# Altium PCB Shablon.PcbDoc
Units mm, origin at the board's own origin, x right, y up, seen from the top; angles counter-clockwise.
Board outline 152.4 x 101.6 mm, 12 copper layers (TopLayer, Internal Plane 1, Internal Plane 2, MidLayer1, MidLayer2, MidLayer3, MidLayer4, MidLayer5, MidLayer6, MidLayer7, MidLayer8, BottomLayer), stack 3.307 mm thick; 1 components, 0 nets, 99 pads, 0 vias.
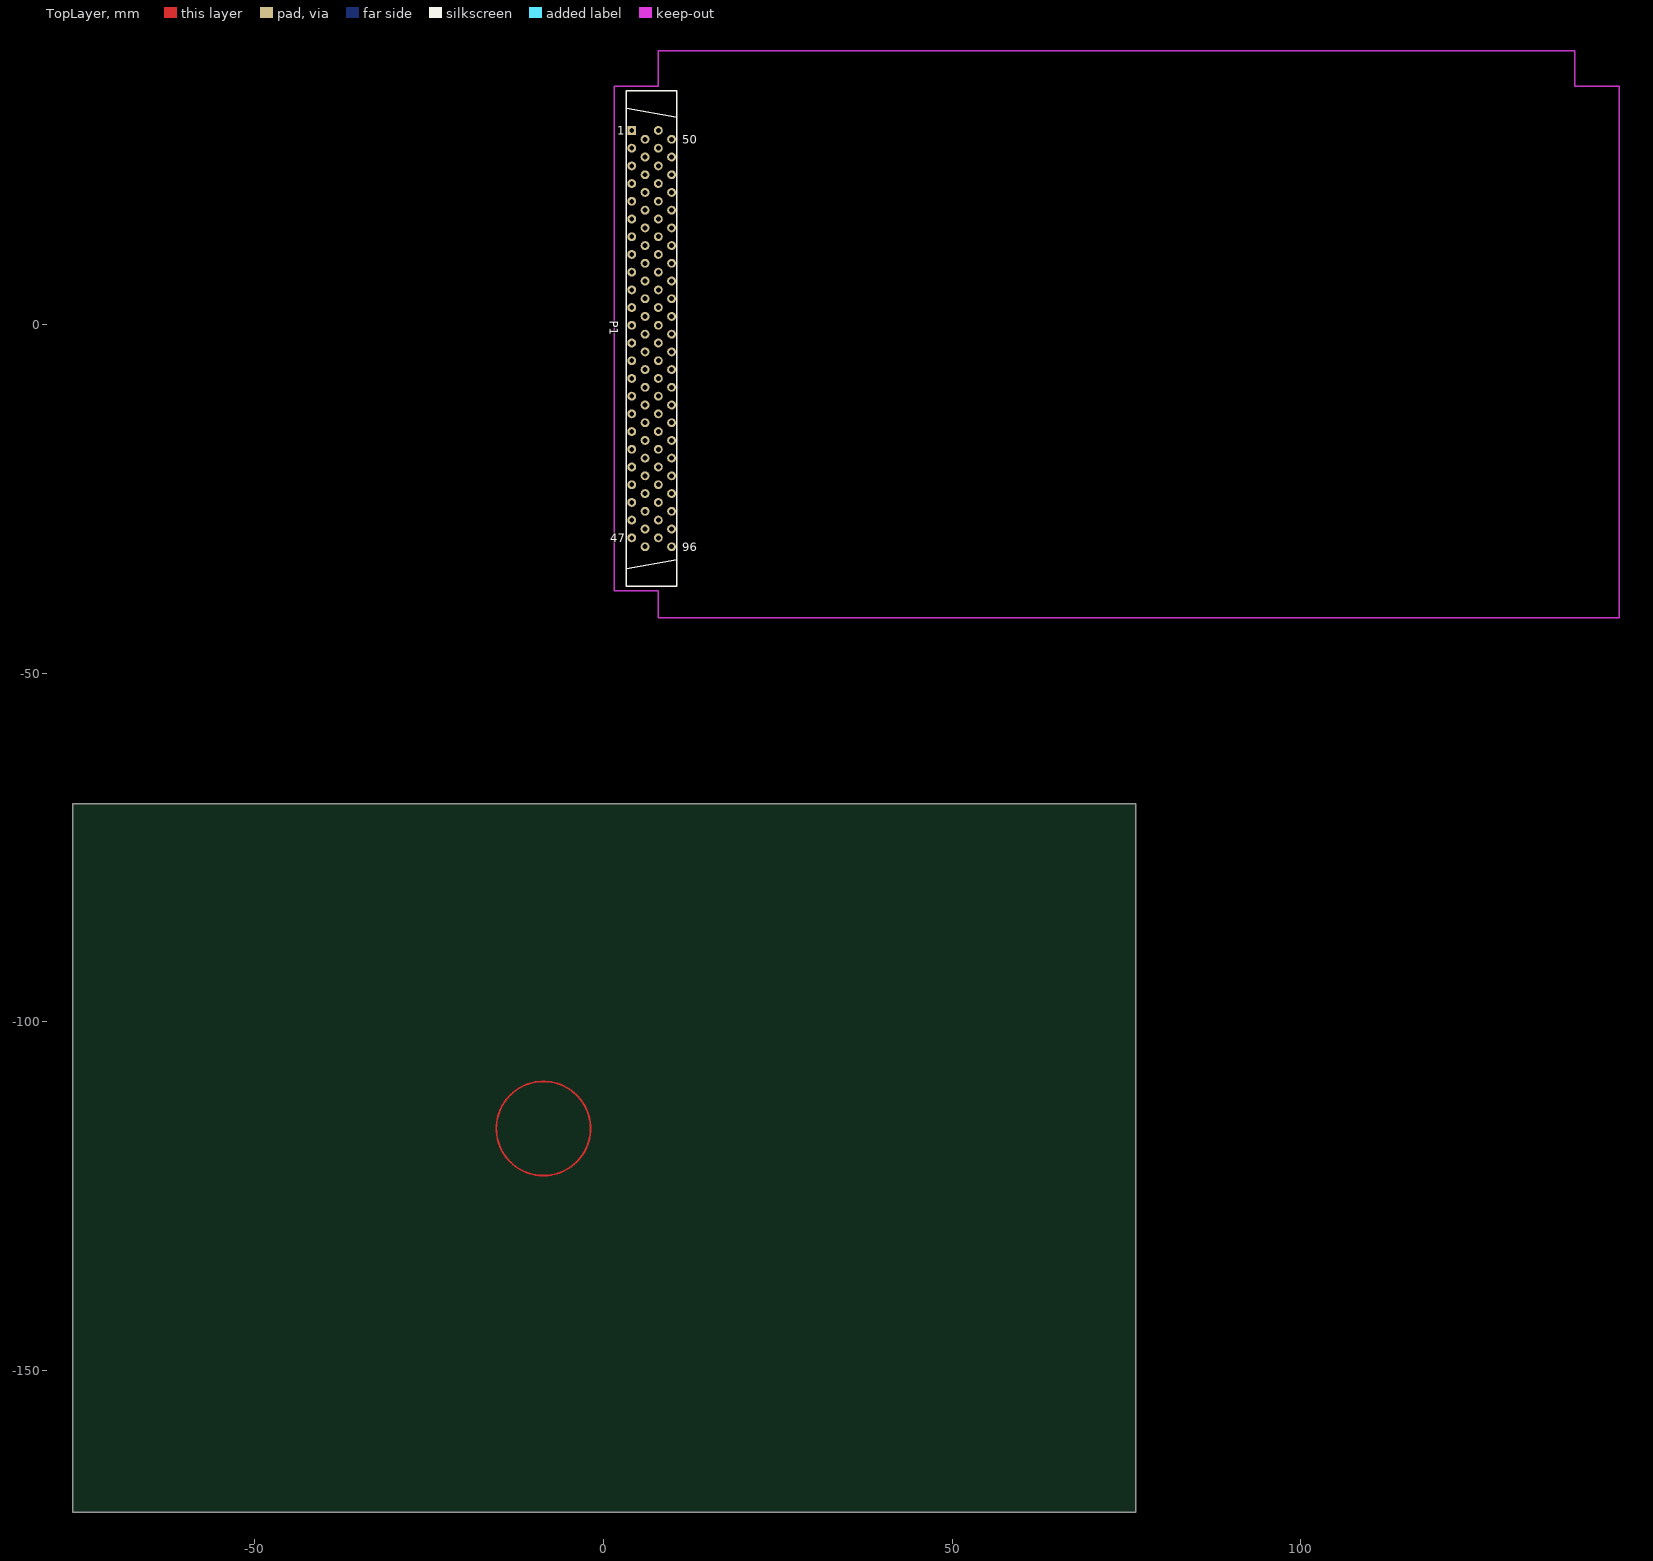
[diagram p0: TopLayer view]
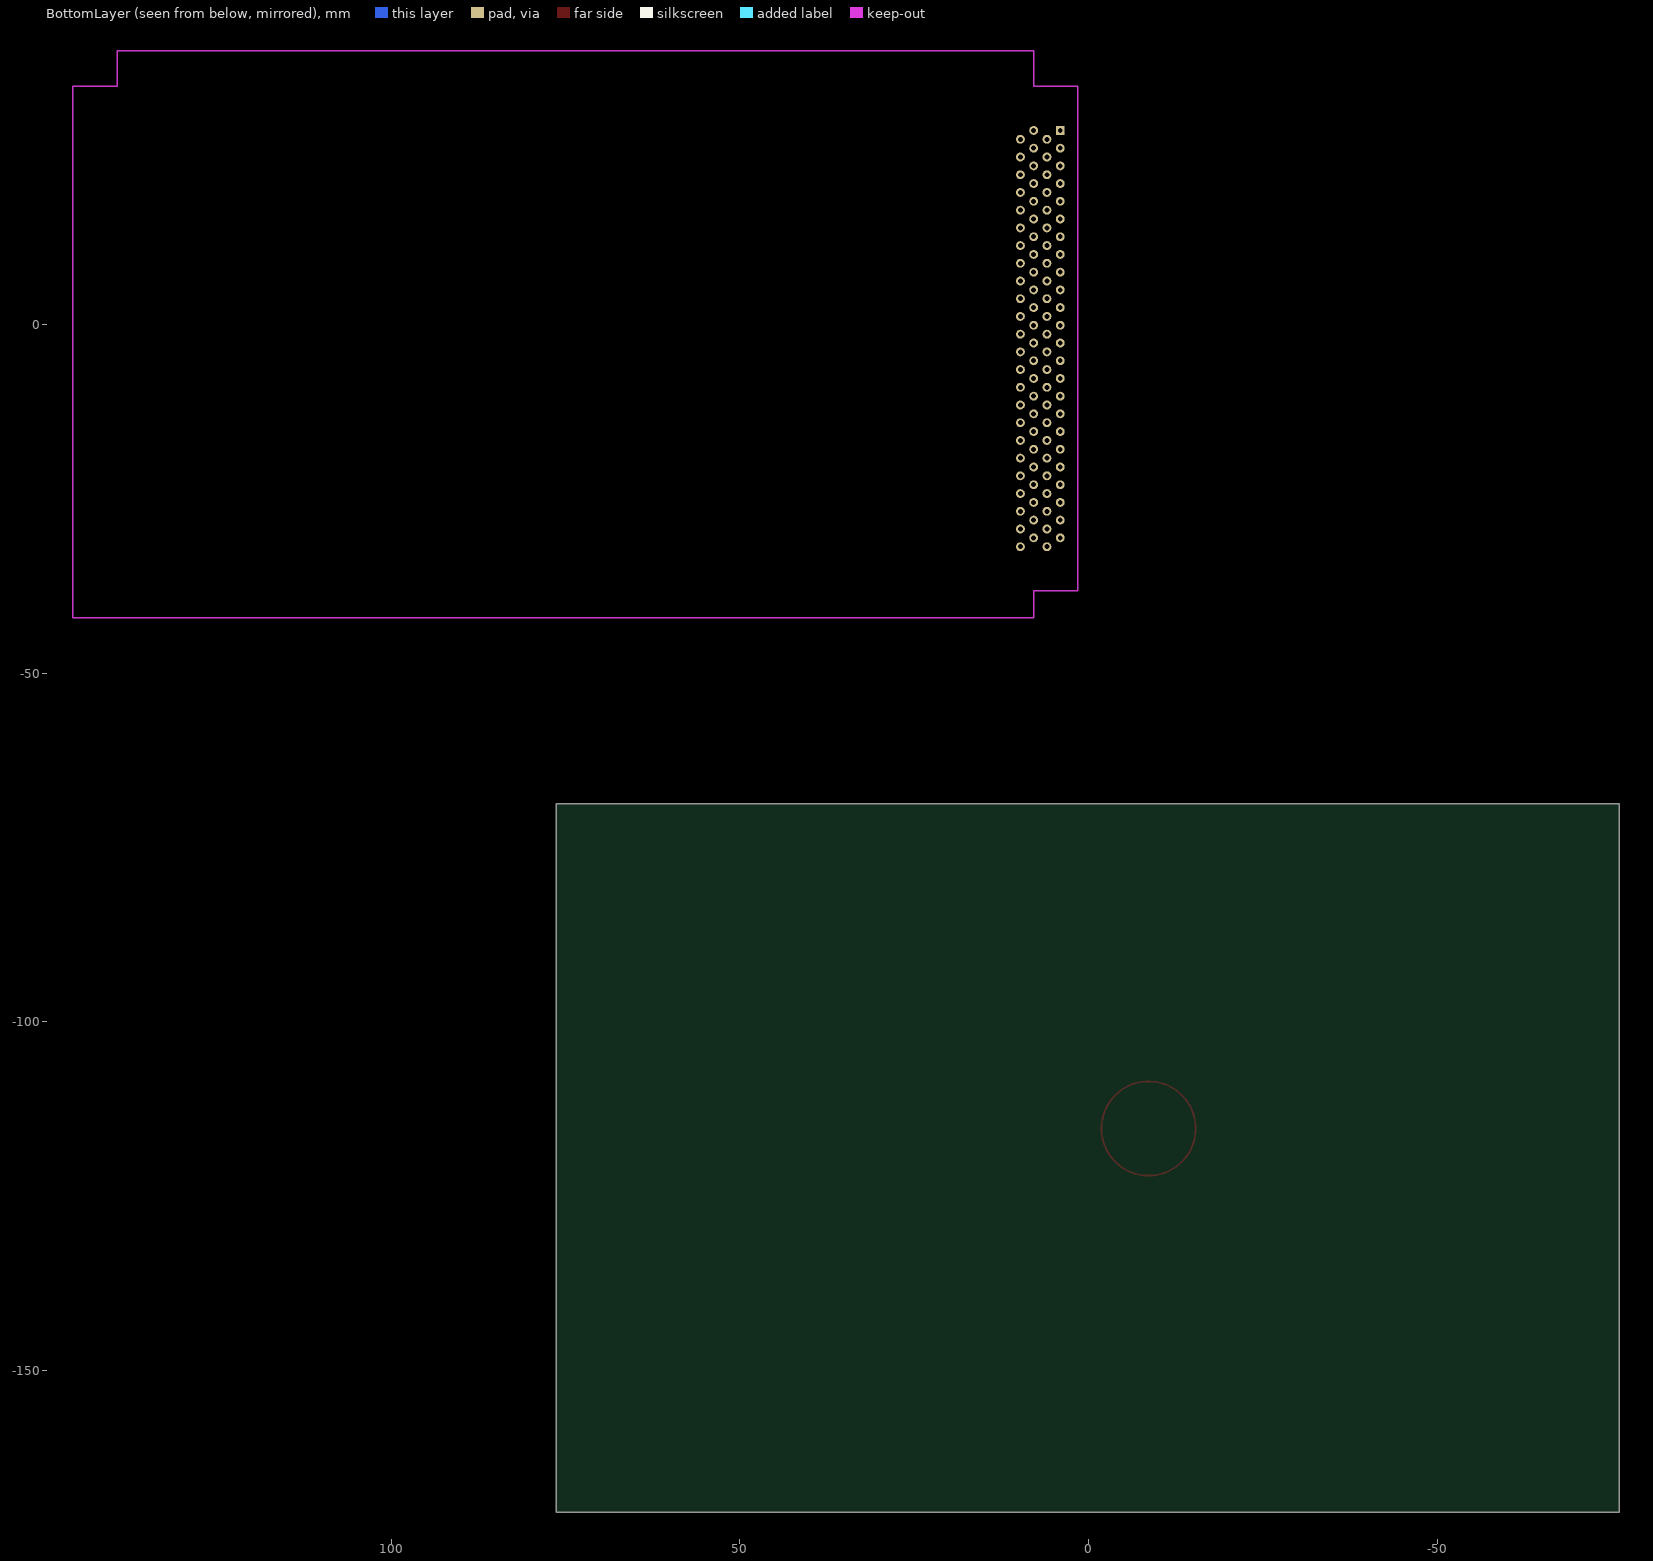
[diagram p1: BottomLayer view, seen from below]
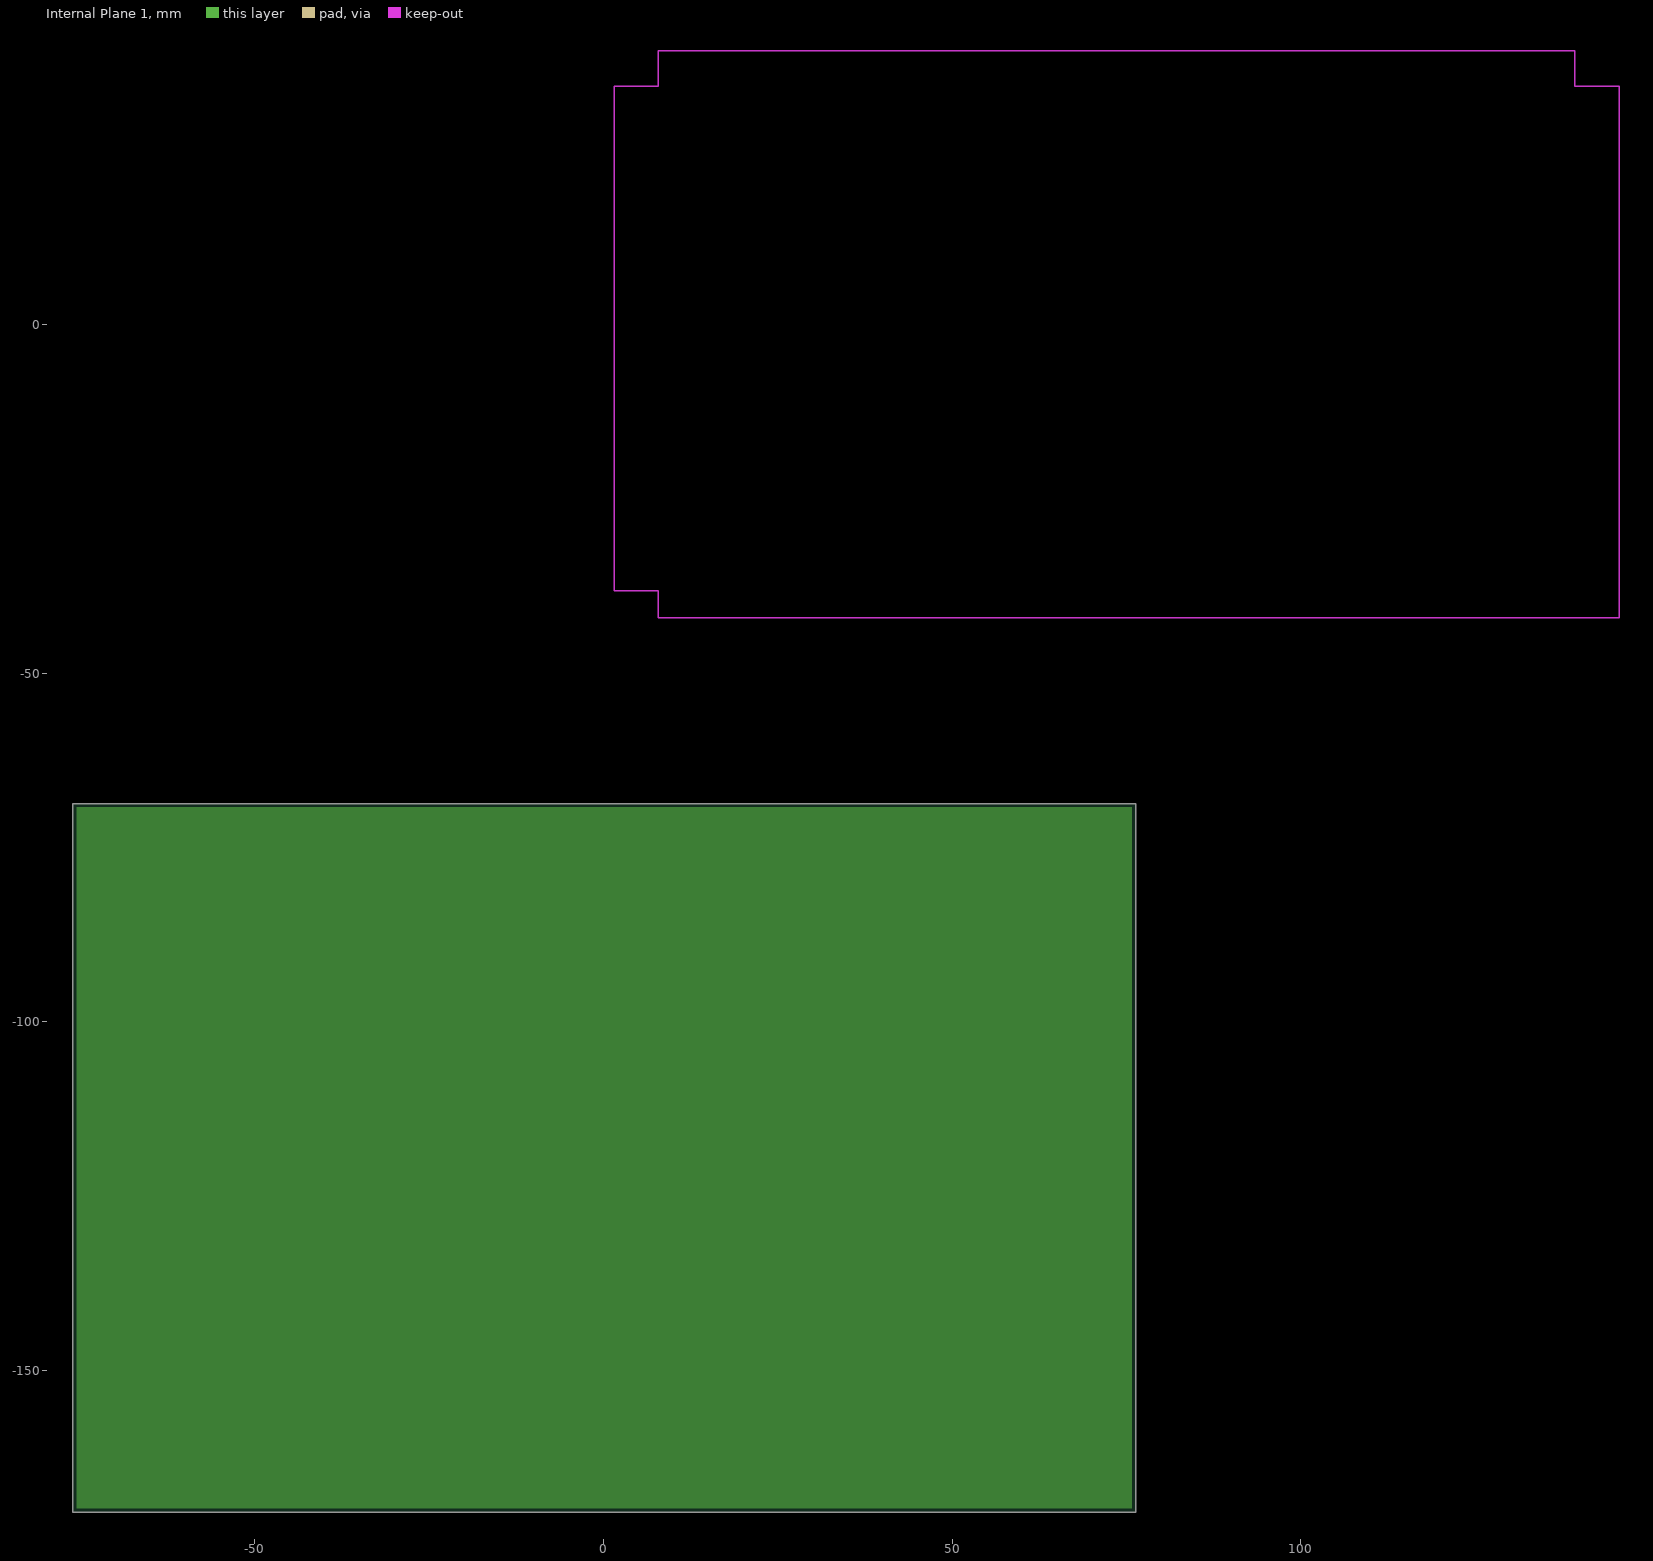
[diagram p2: Internal Plane 1, clearances drawn from the general rule]
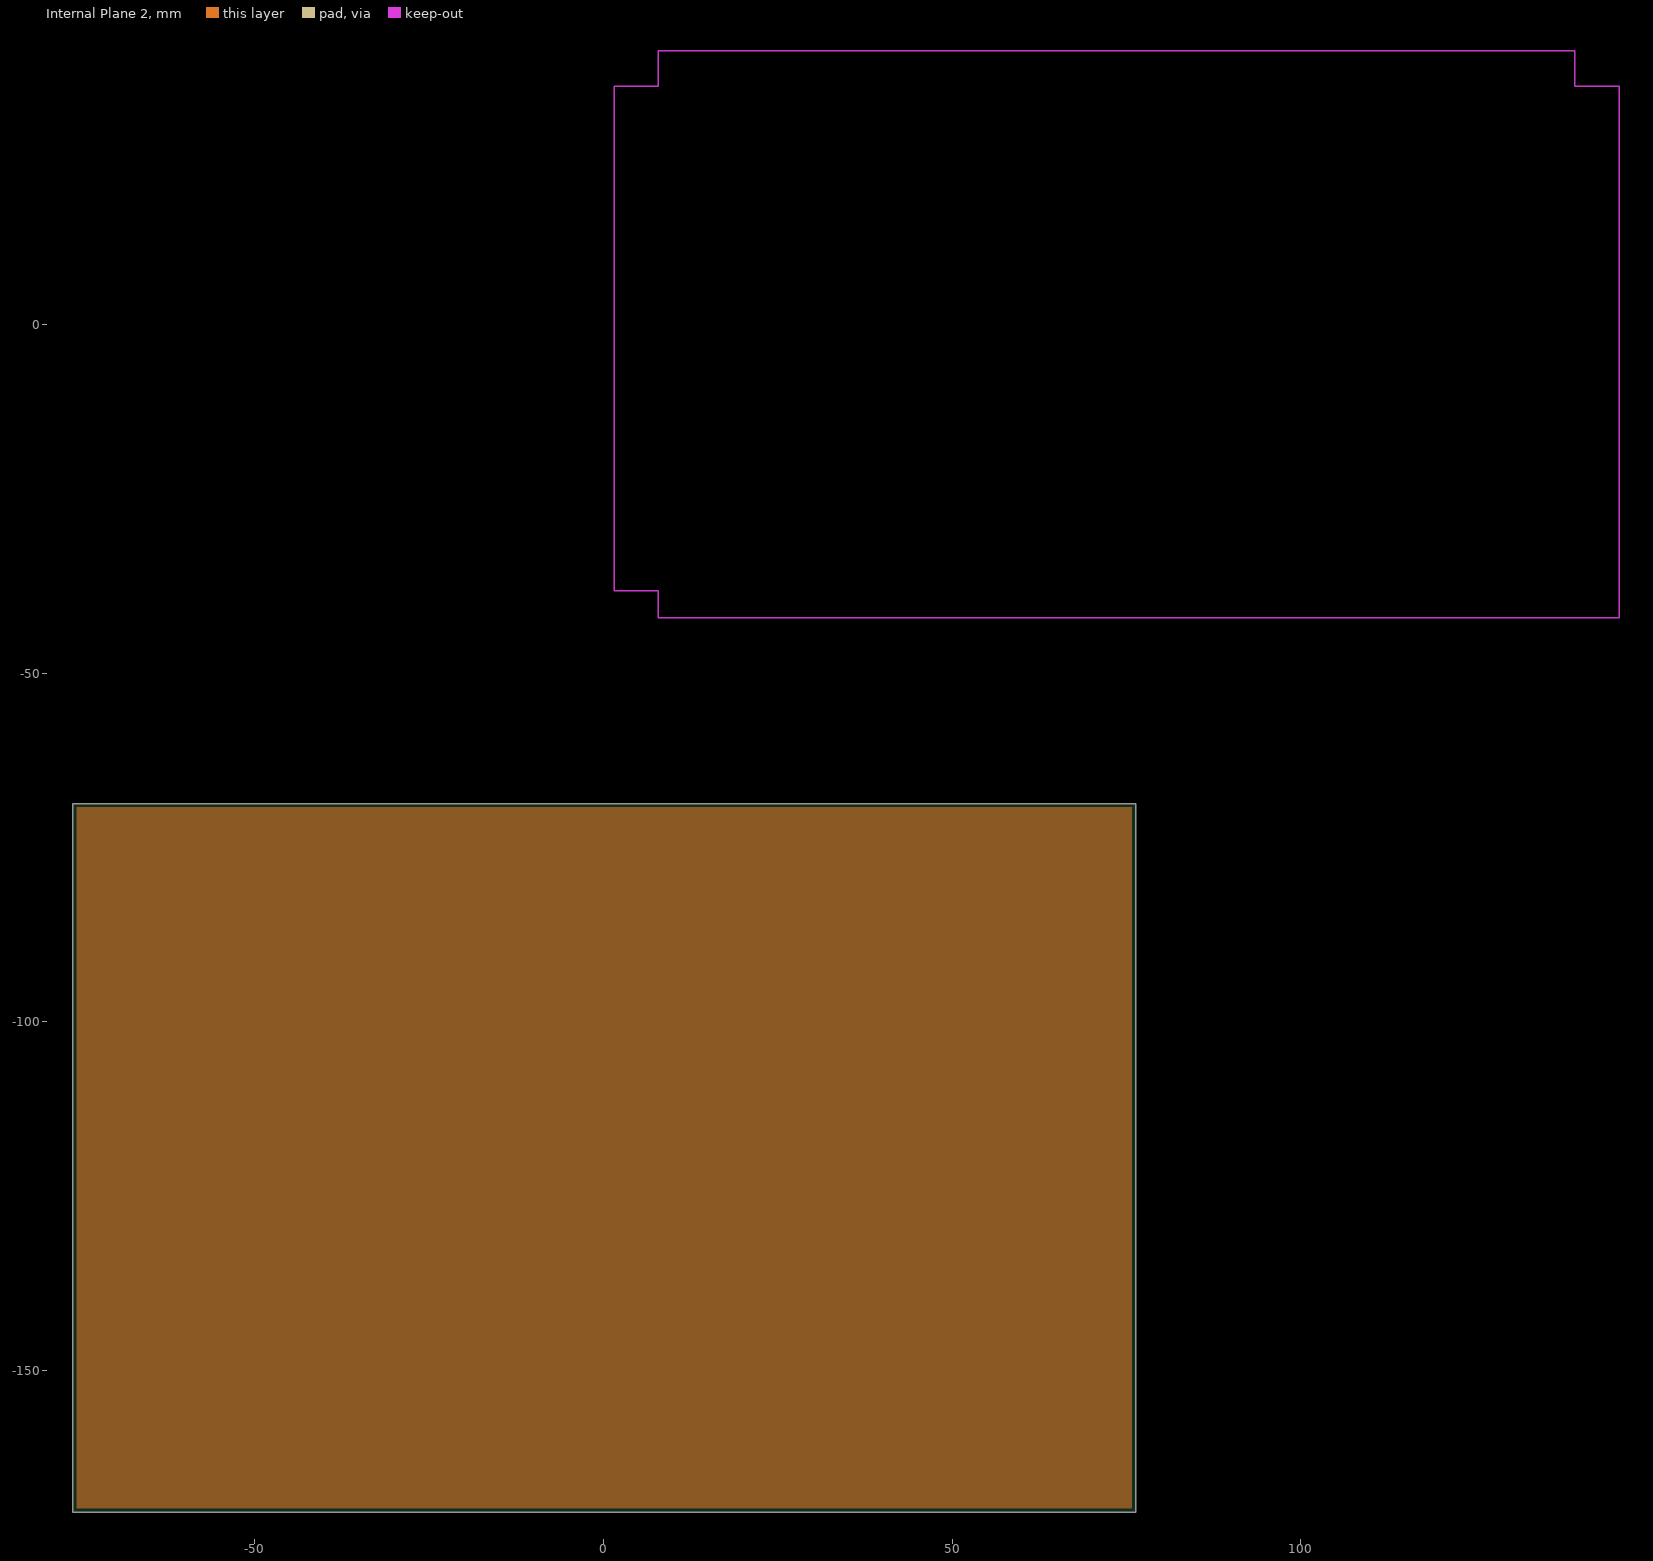
[diagram p3: Internal Plane 2, clearances drawn from the general rule]
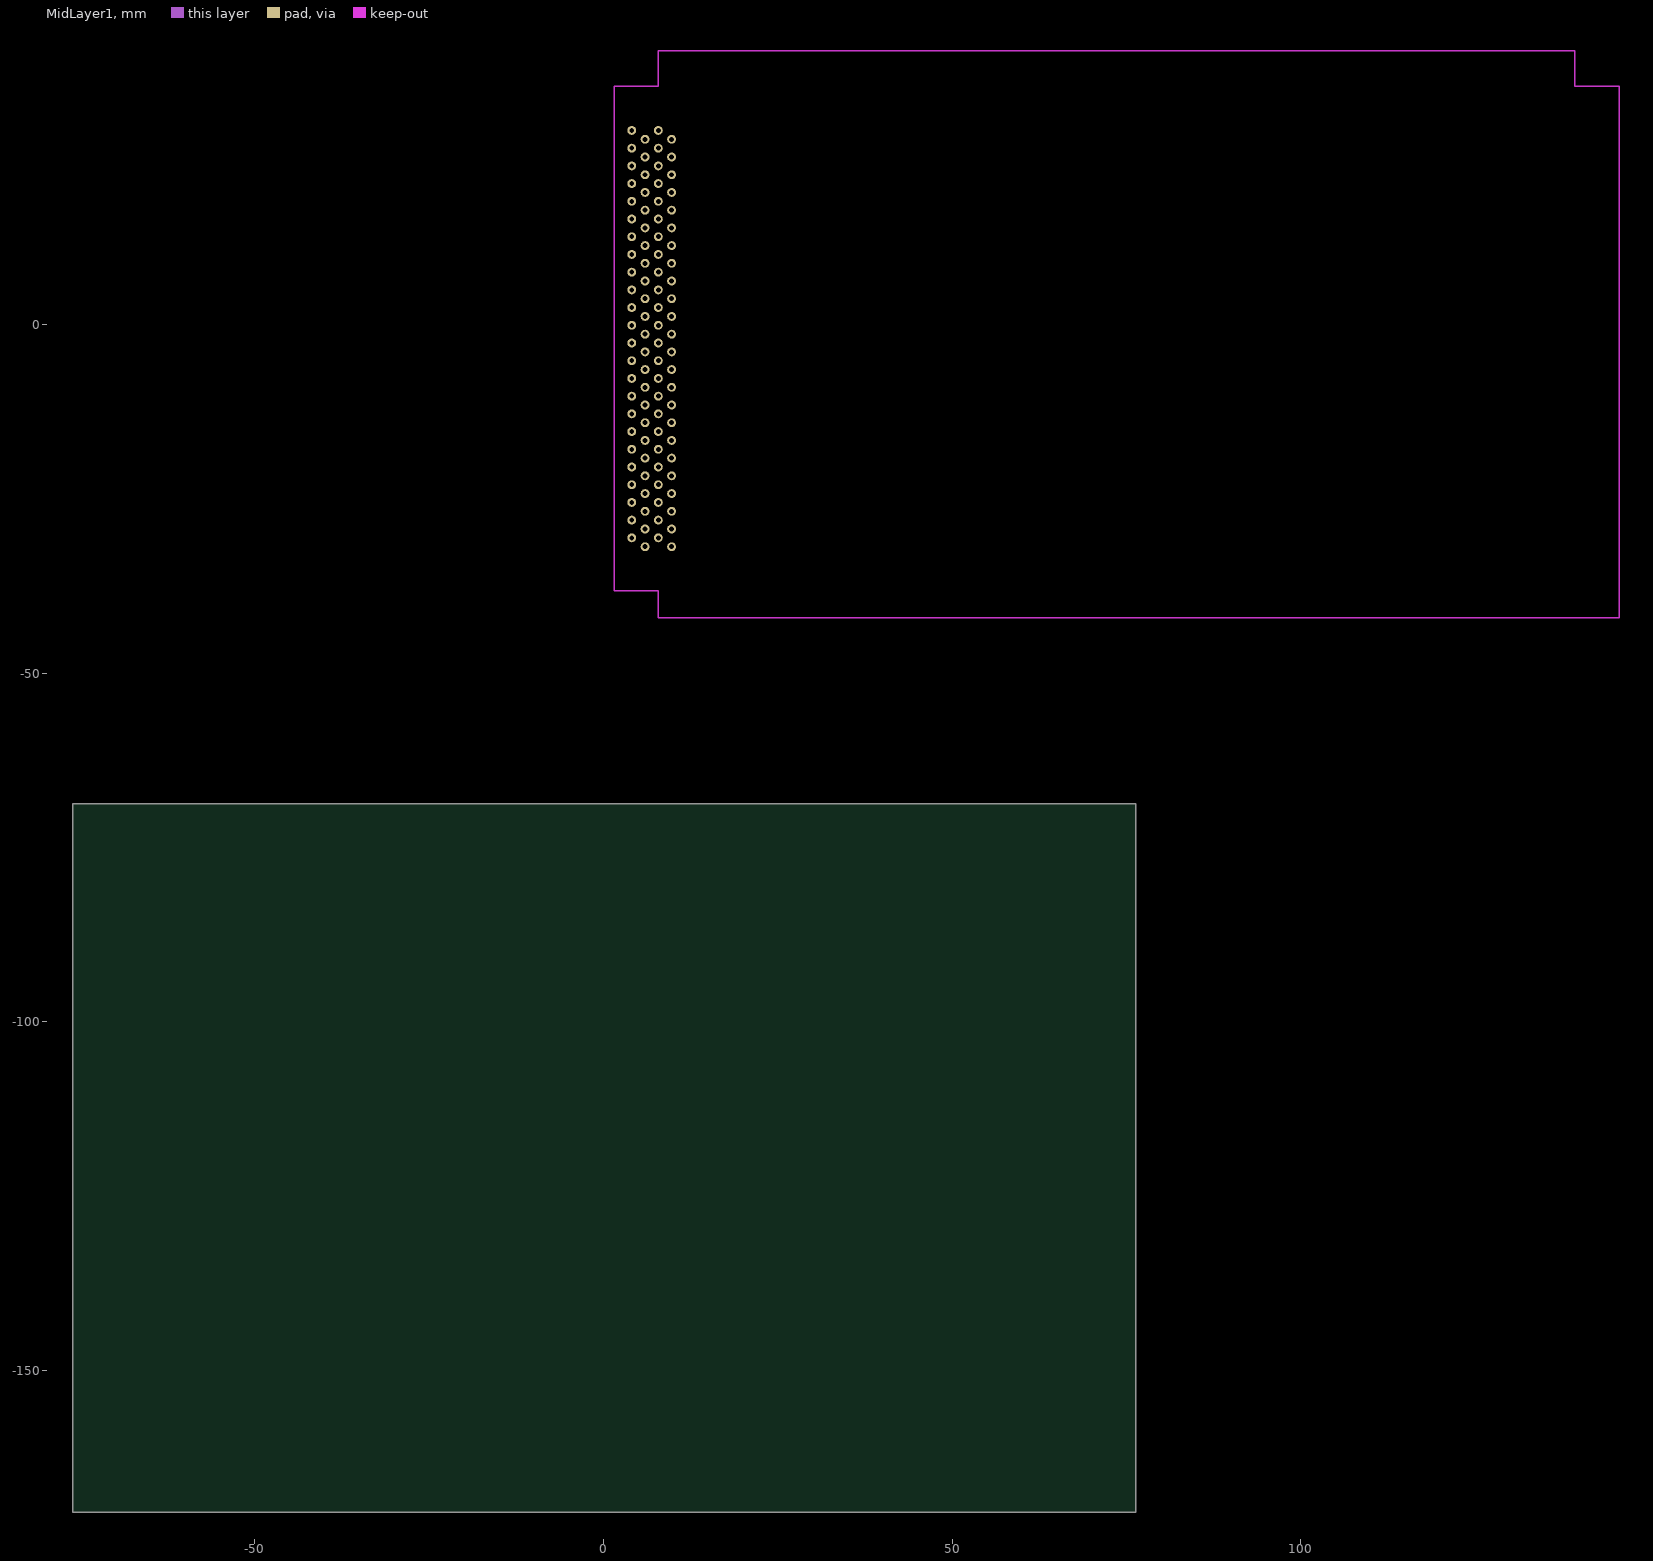
[diagram p4: MidLayer1]
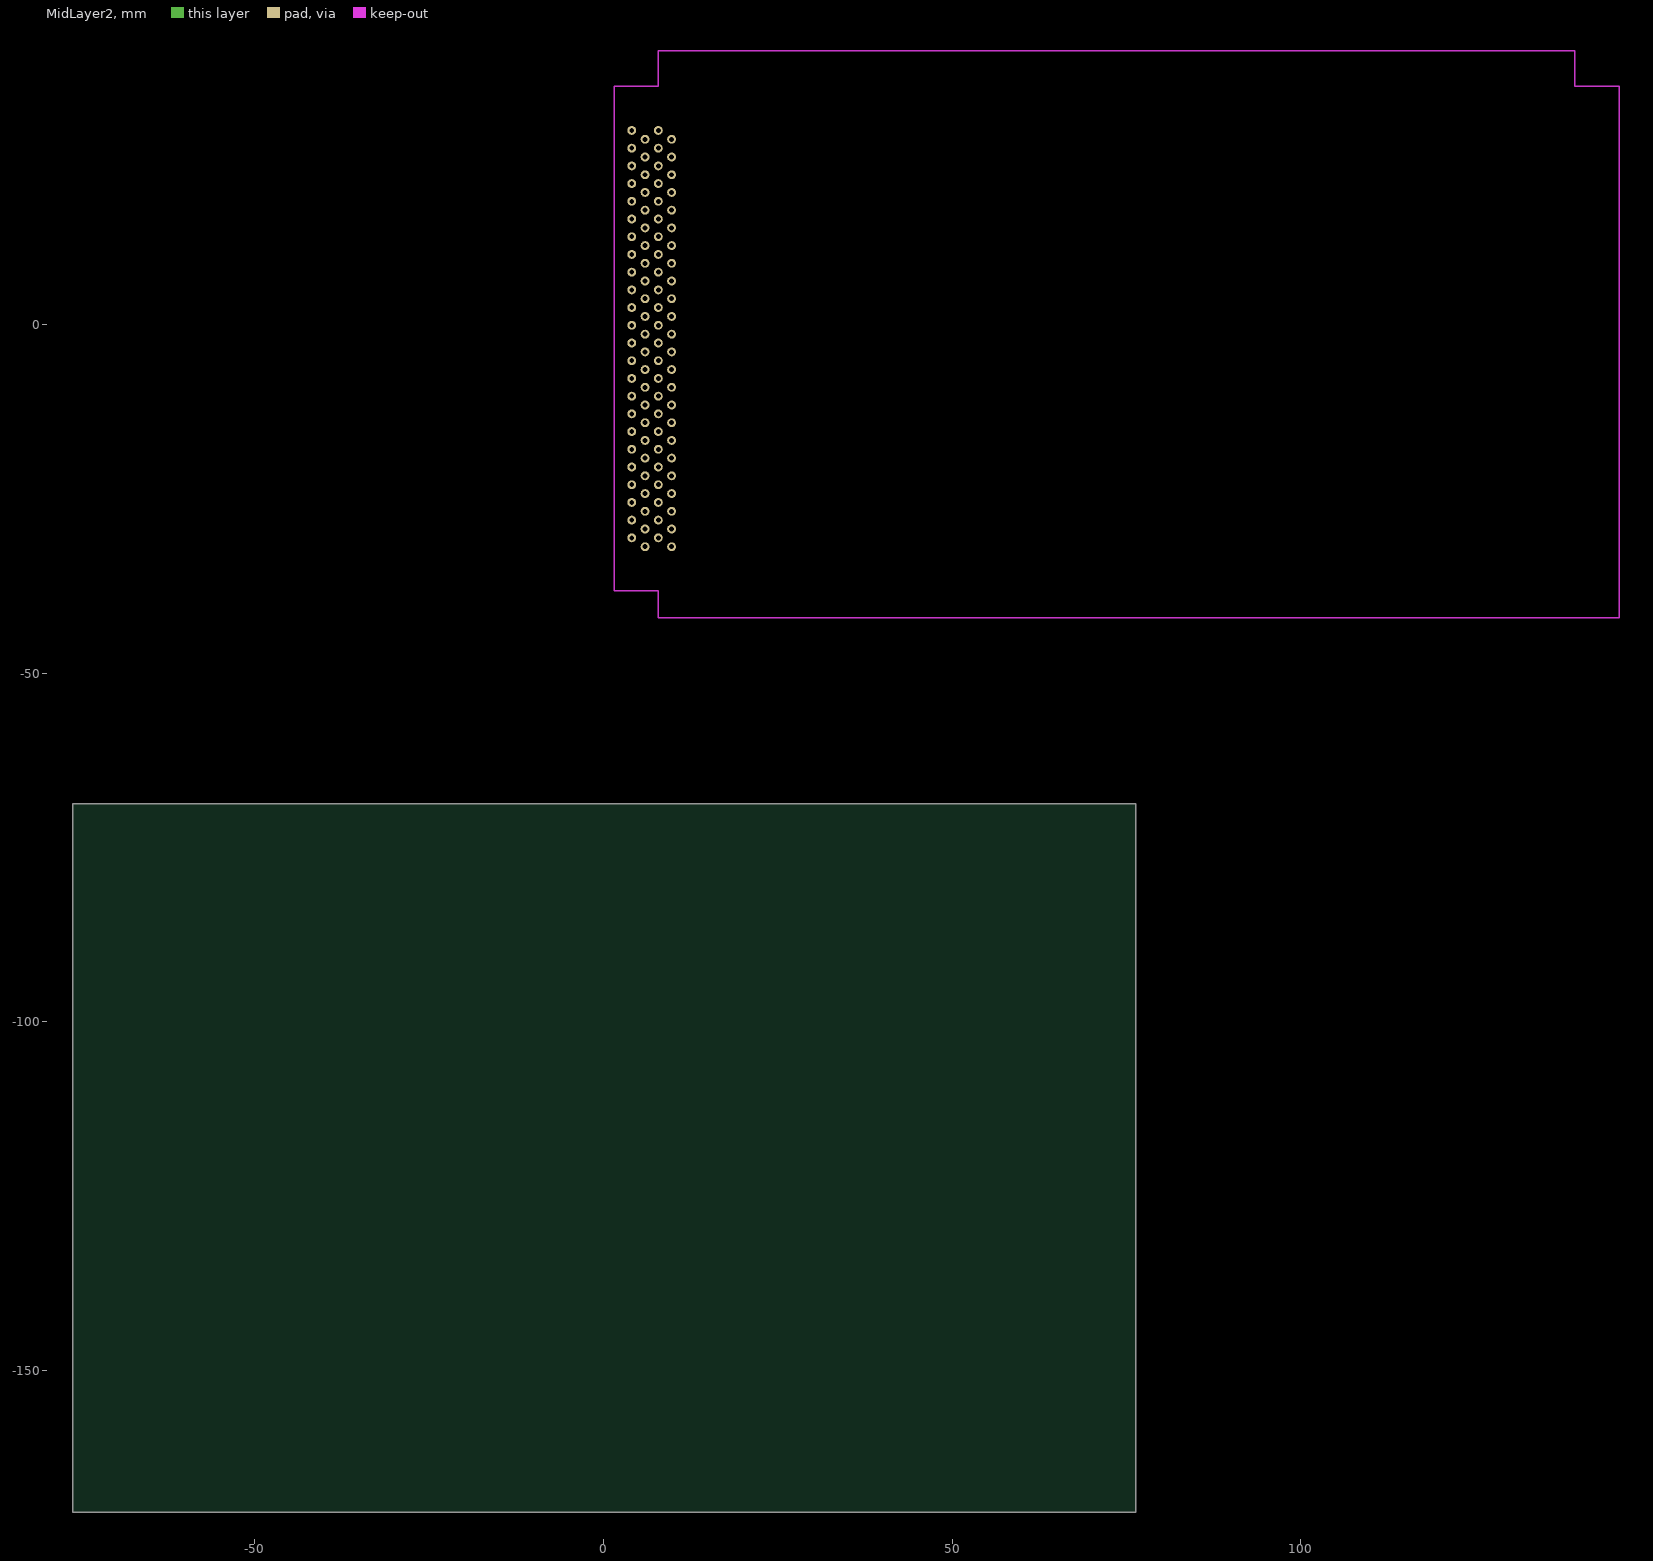
[diagram p5: MidLayer2]
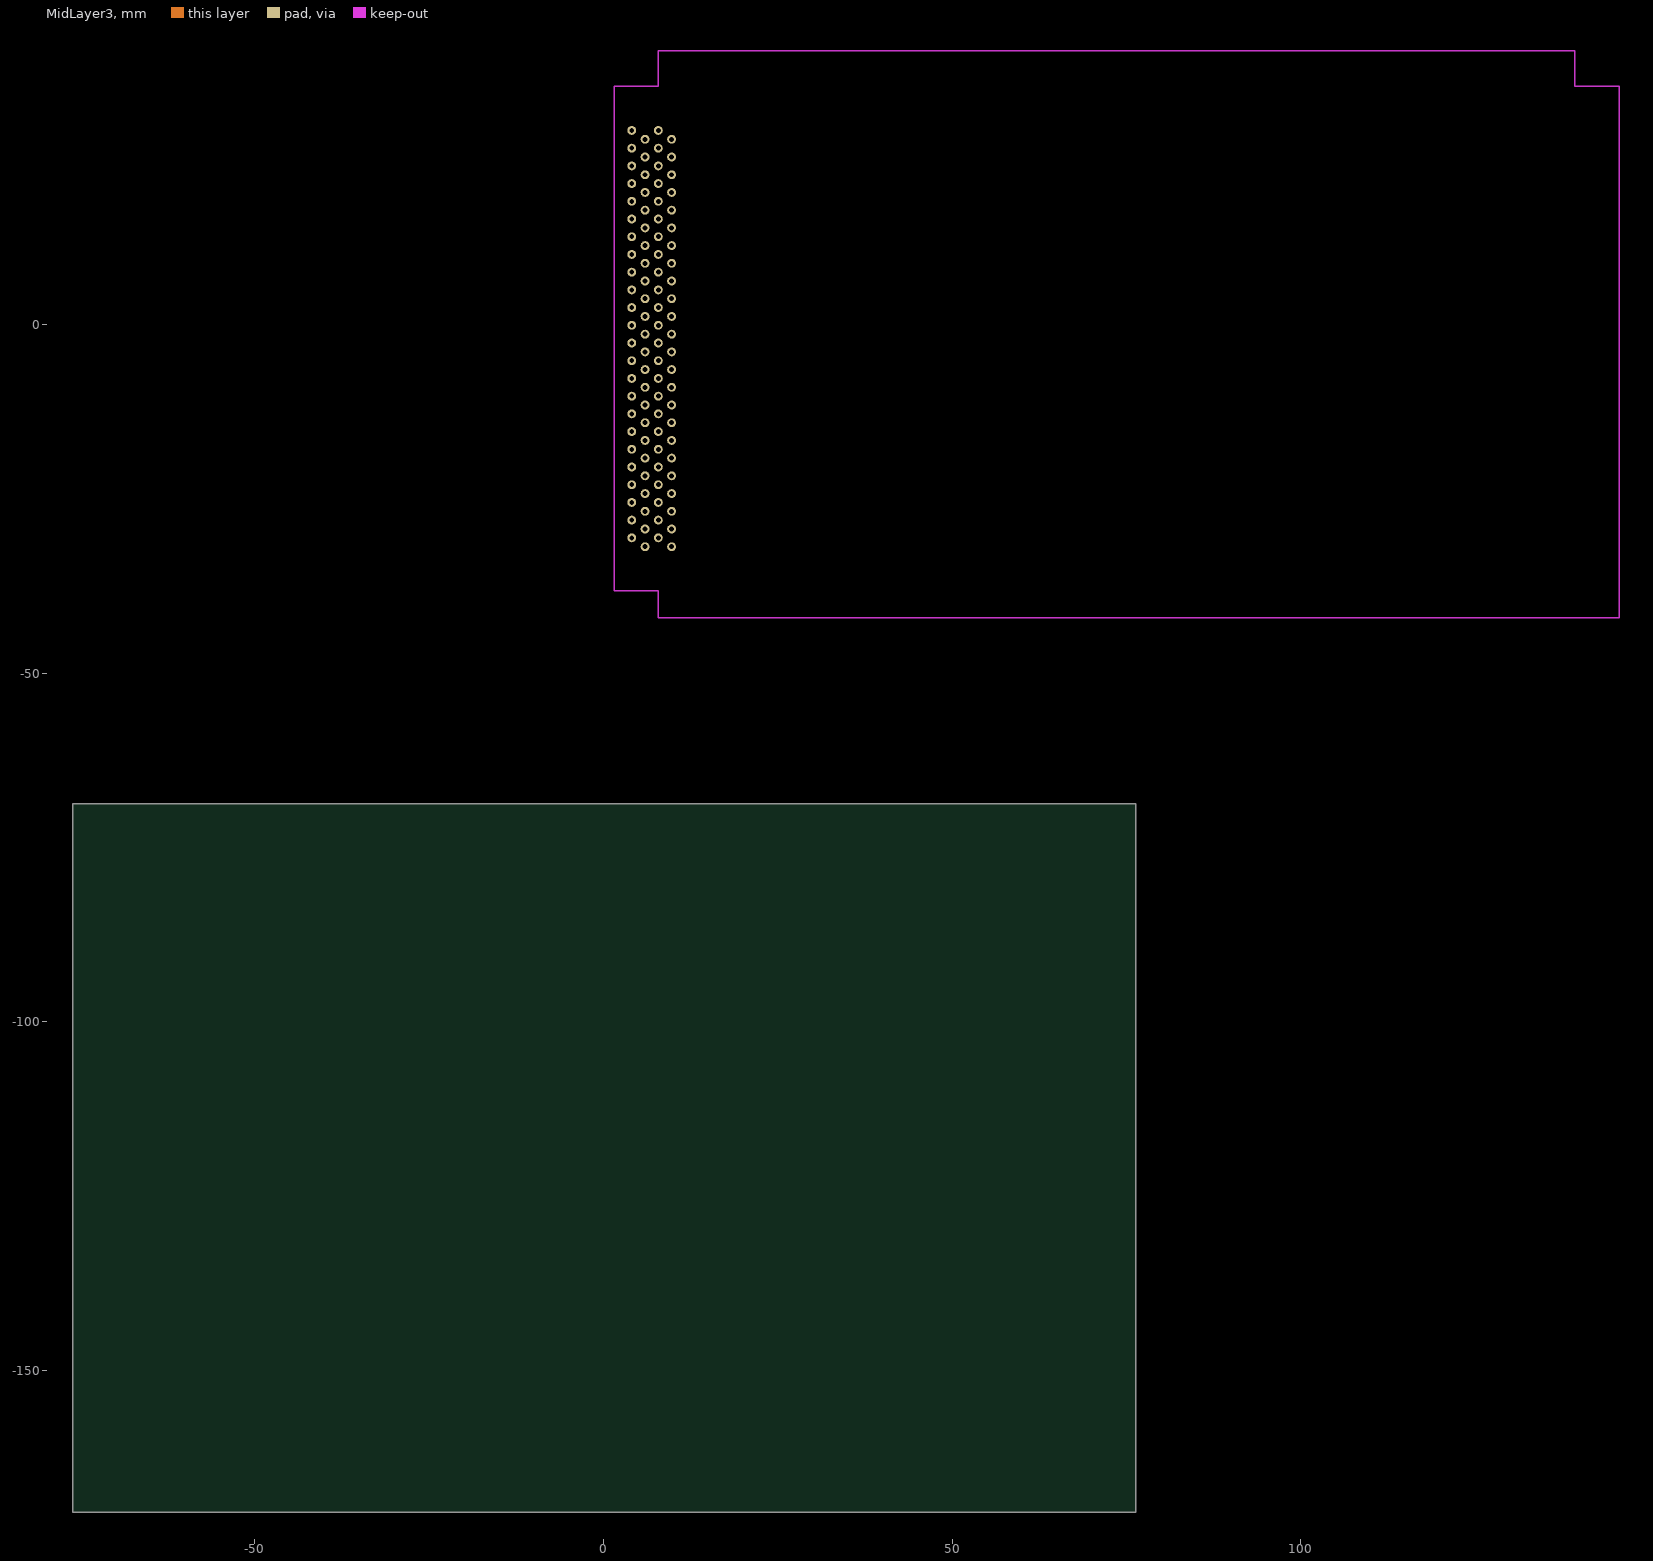
[diagram p6: MidLayer3]
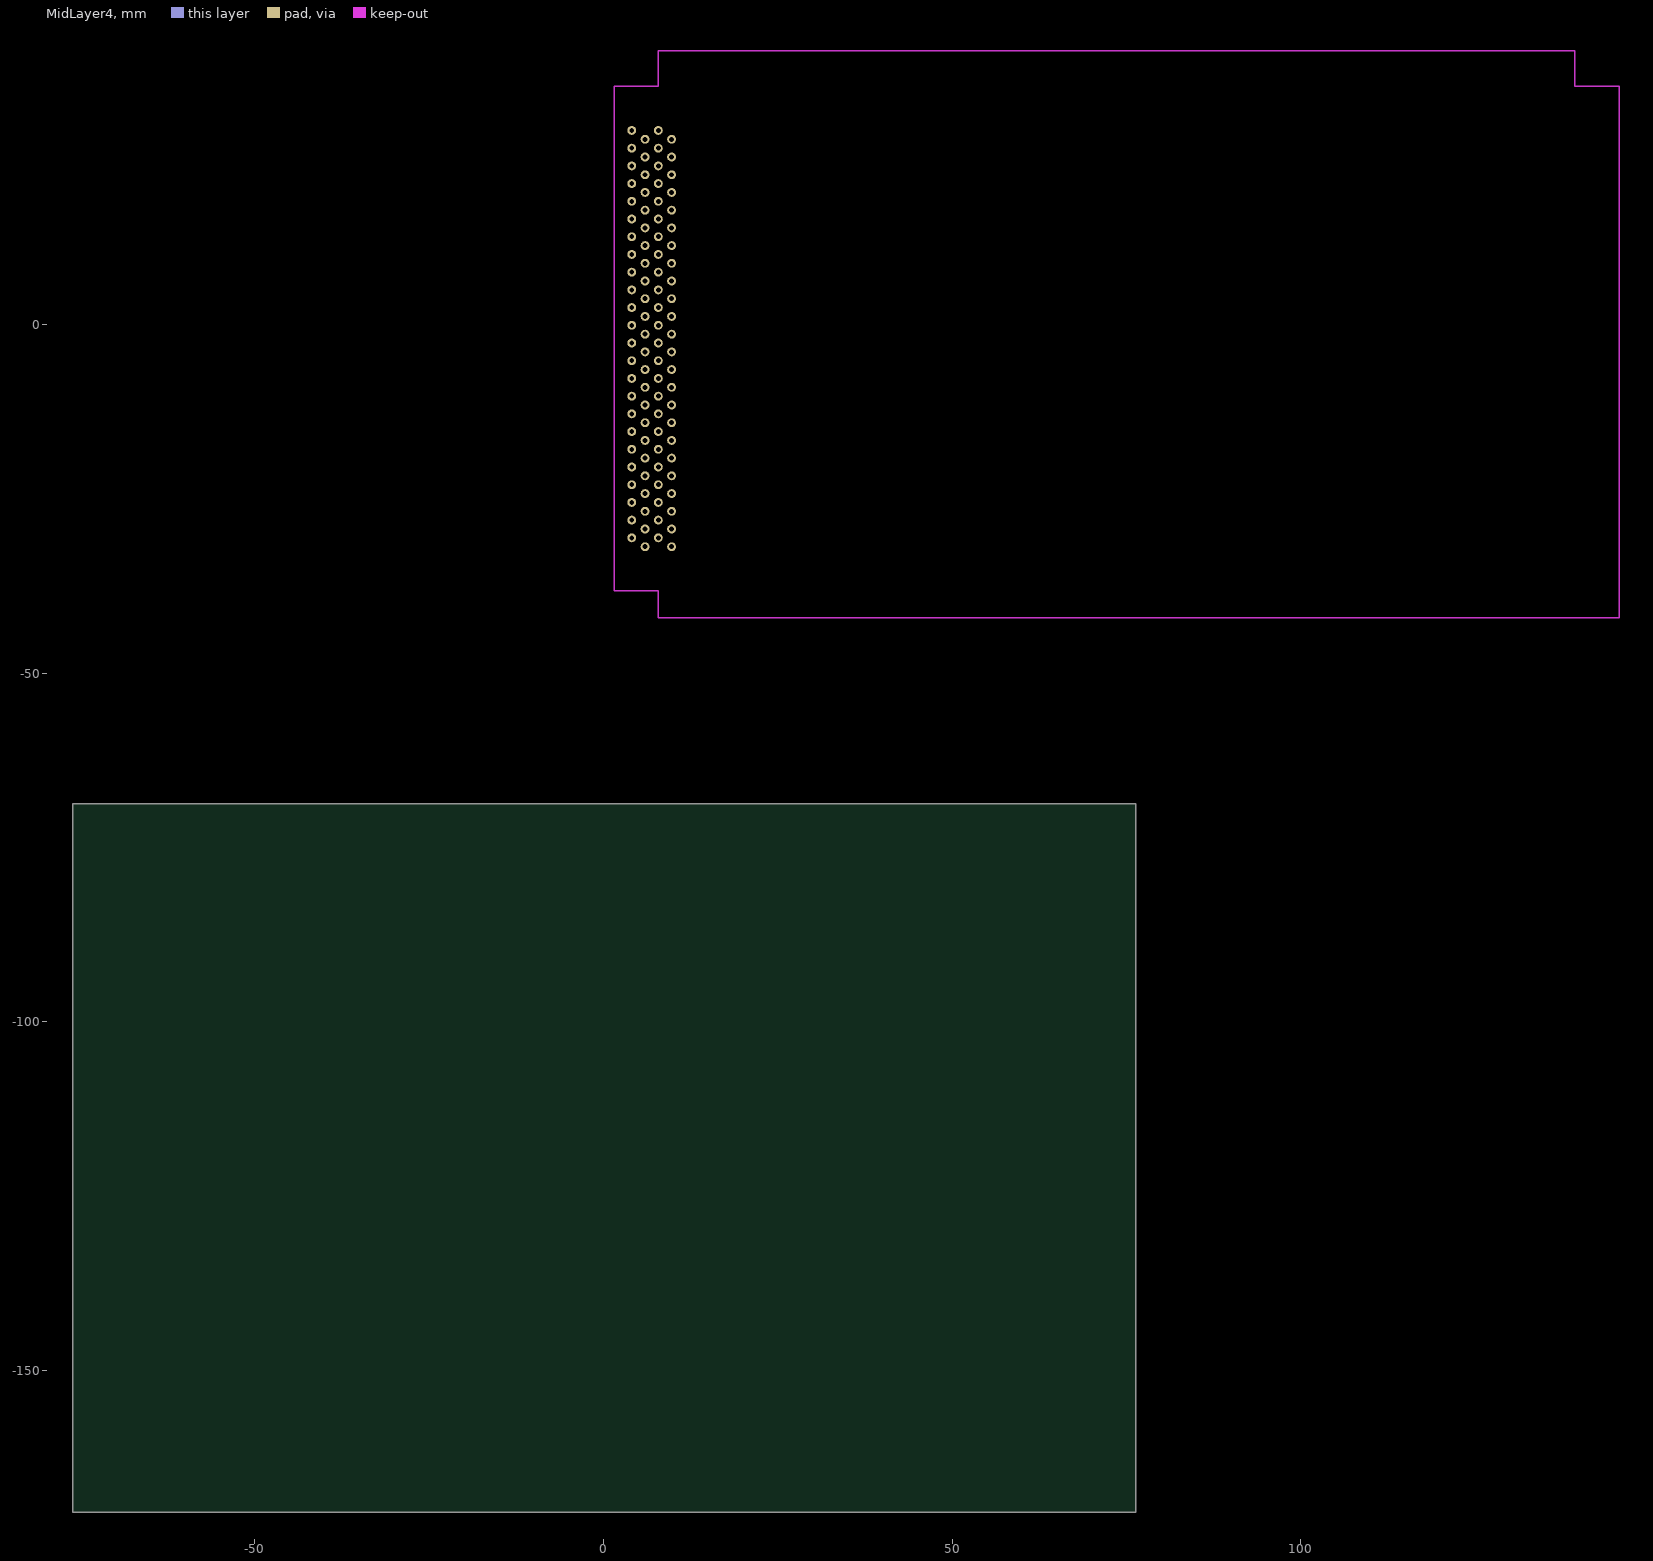
[diagram p7: MidLayer4]
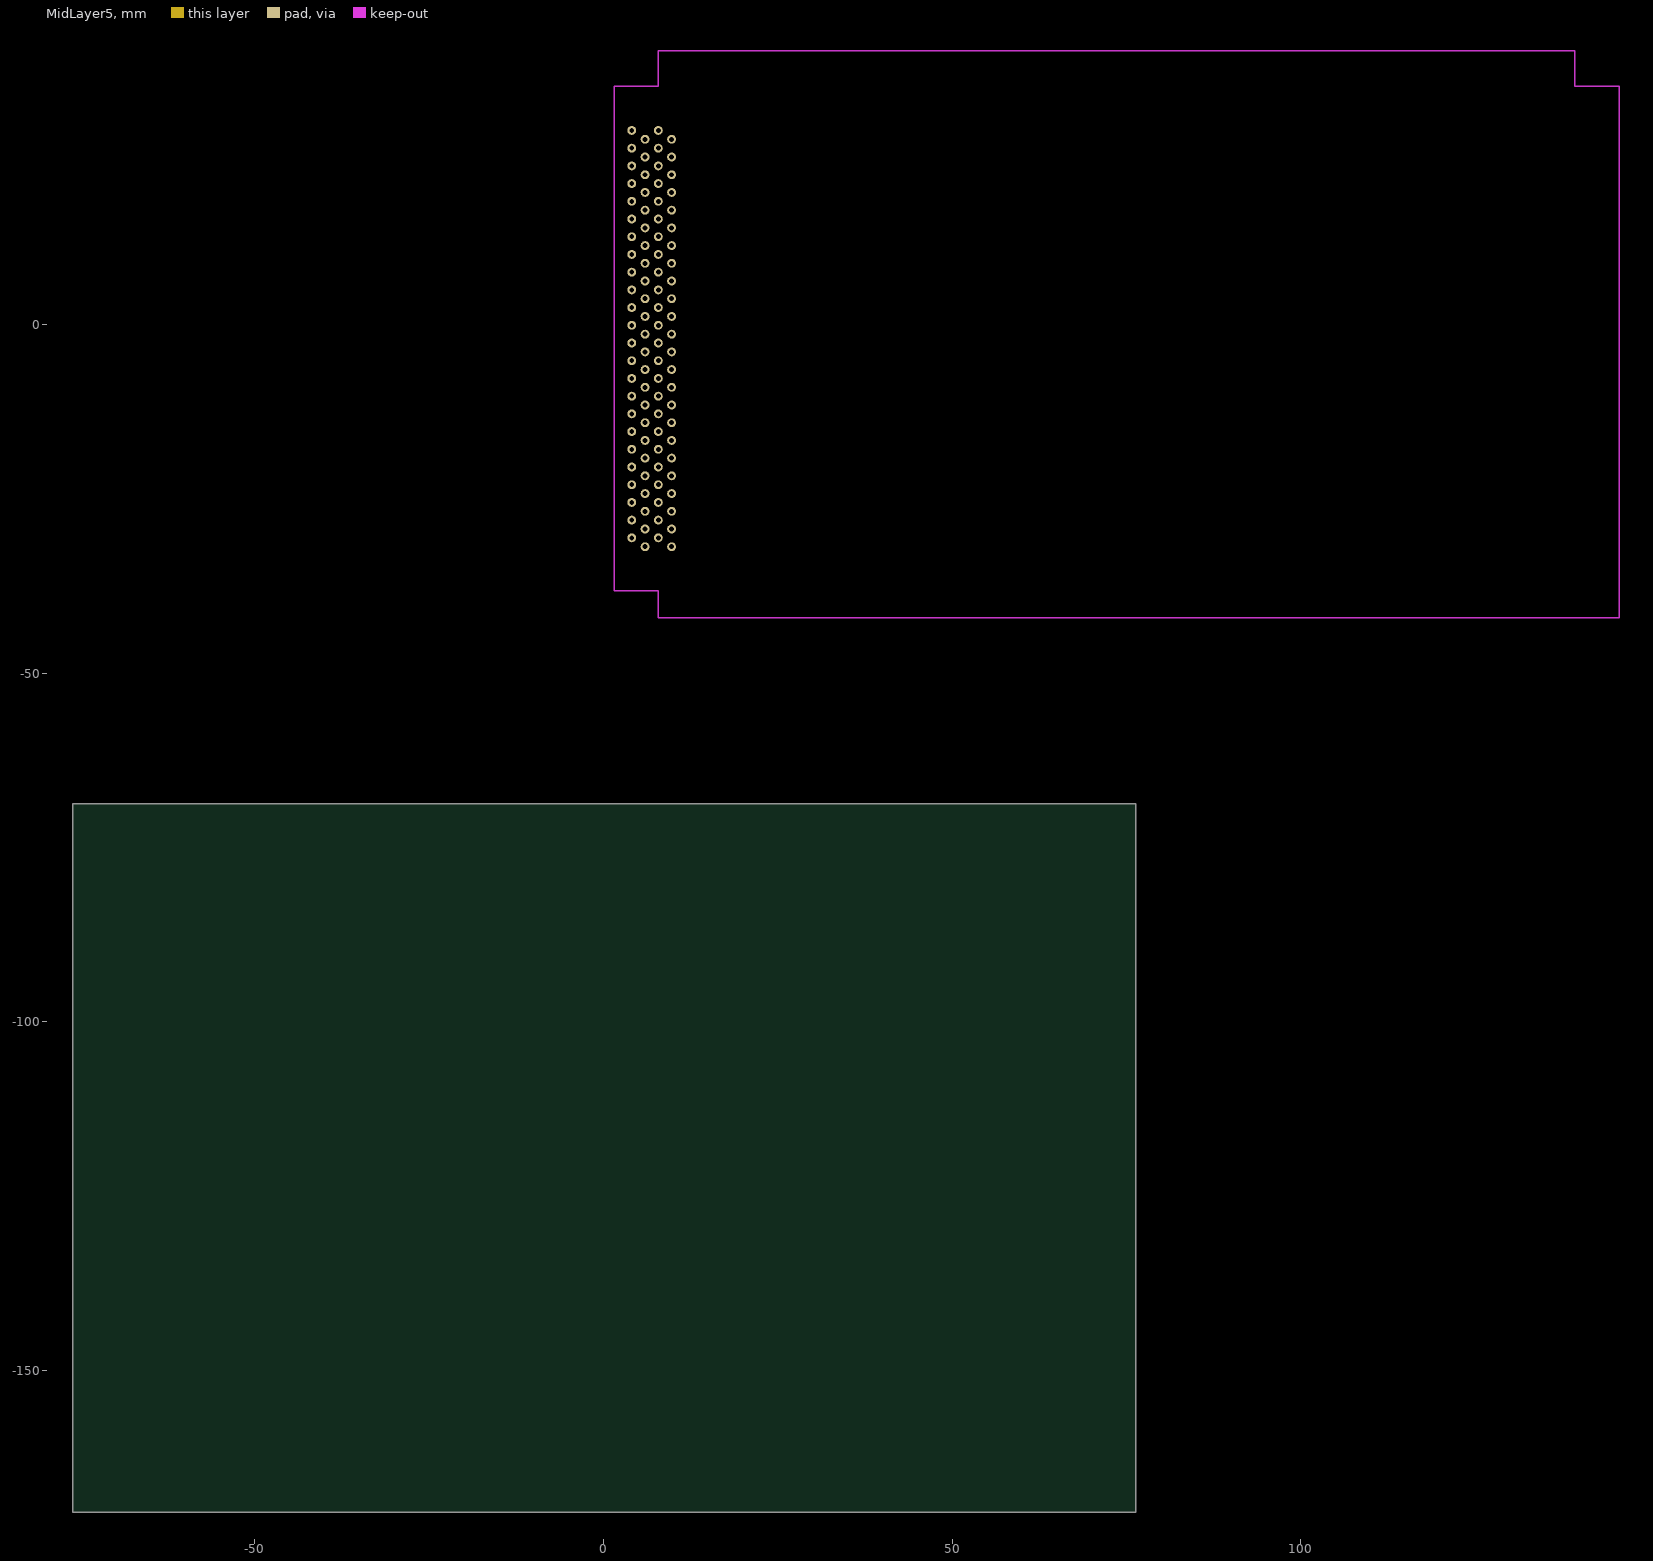
[diagram p8: MidLayer5]
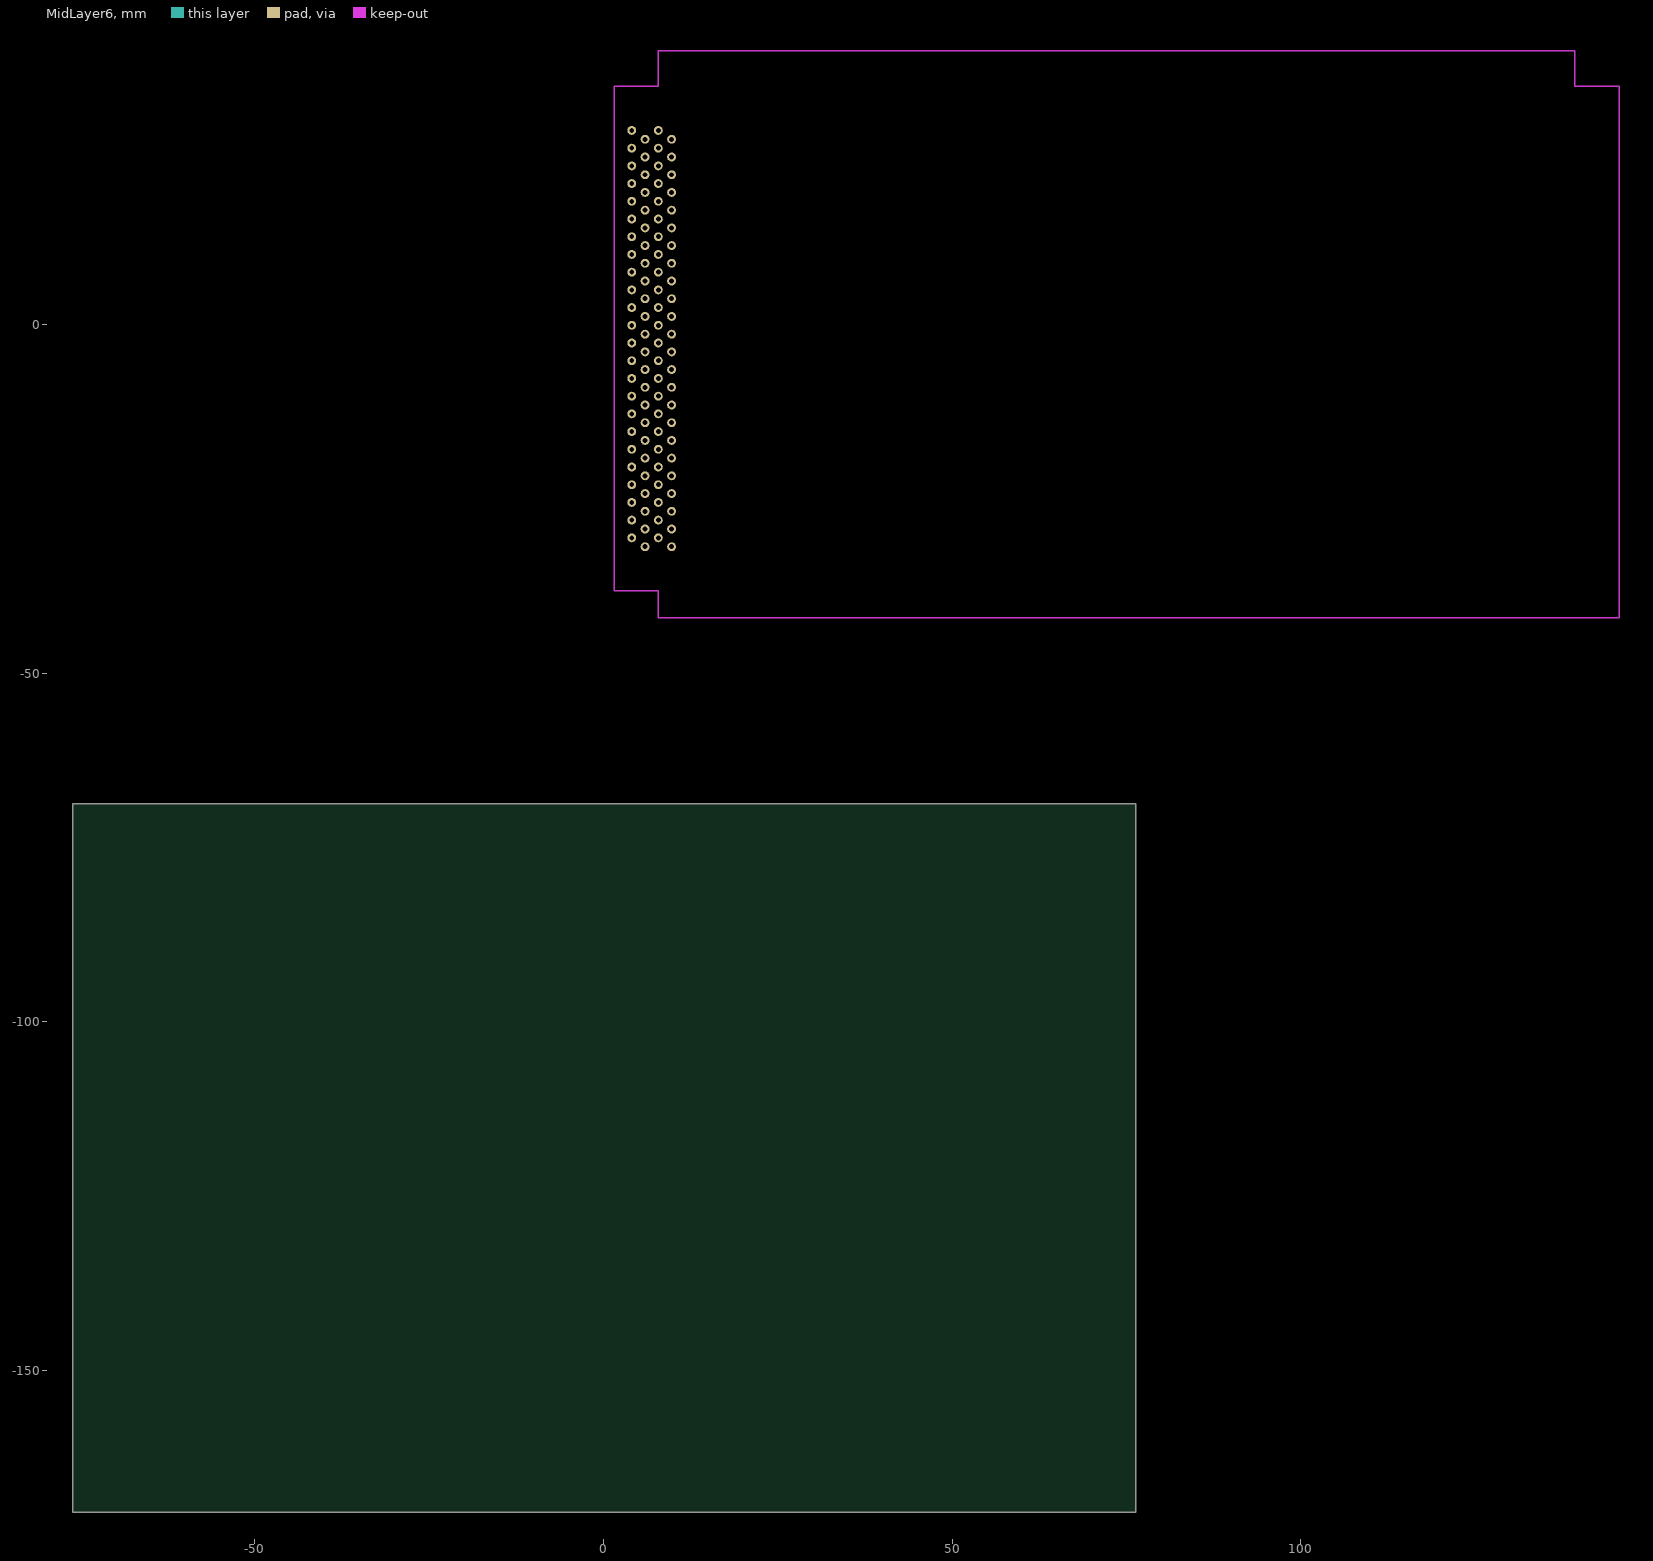
[diagram p9: MidLayer6]
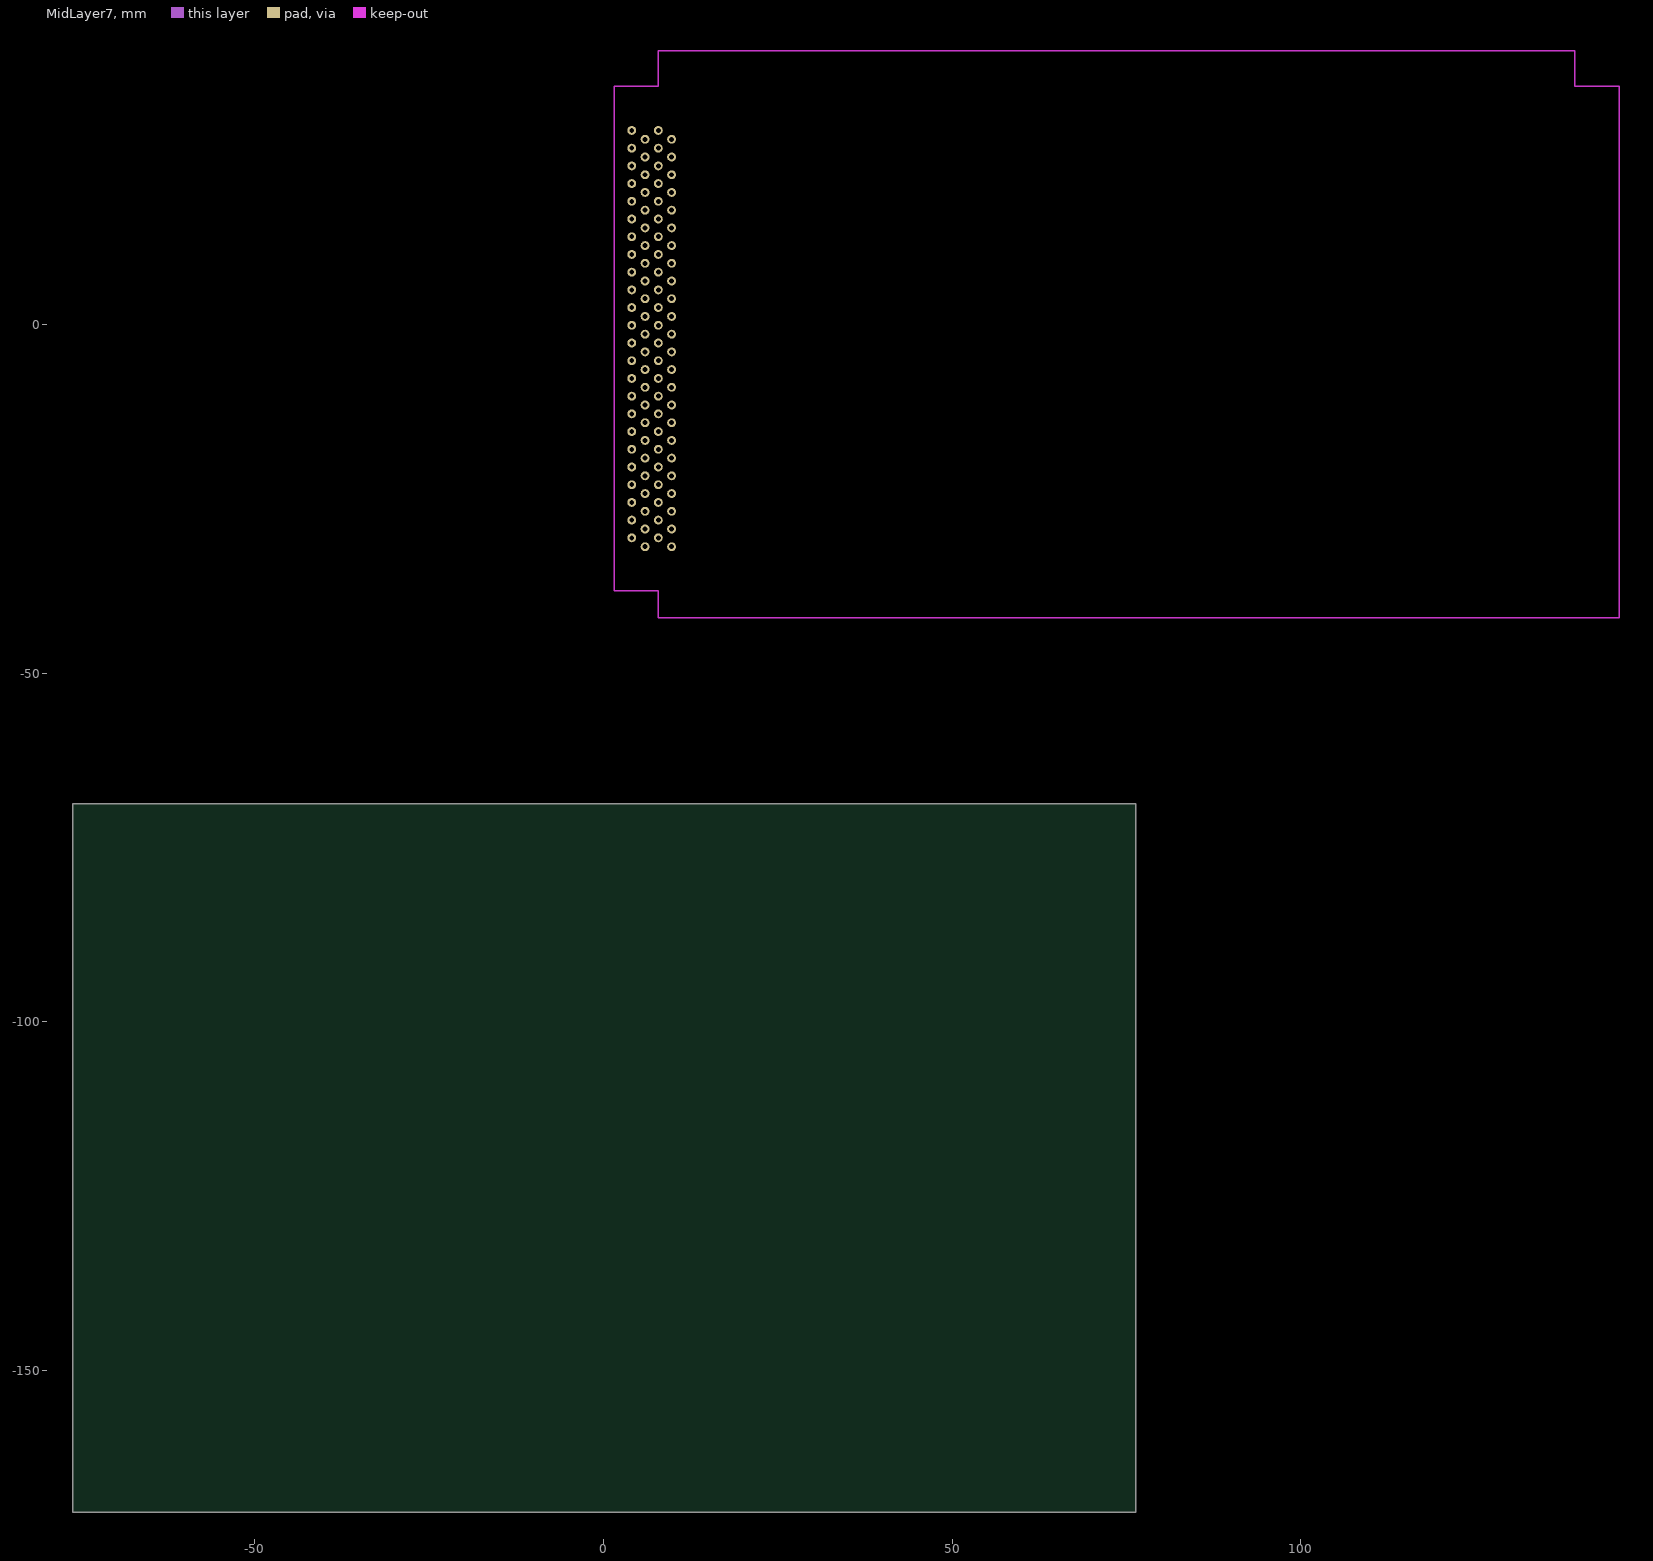
[diagram p10: MidLayer7]
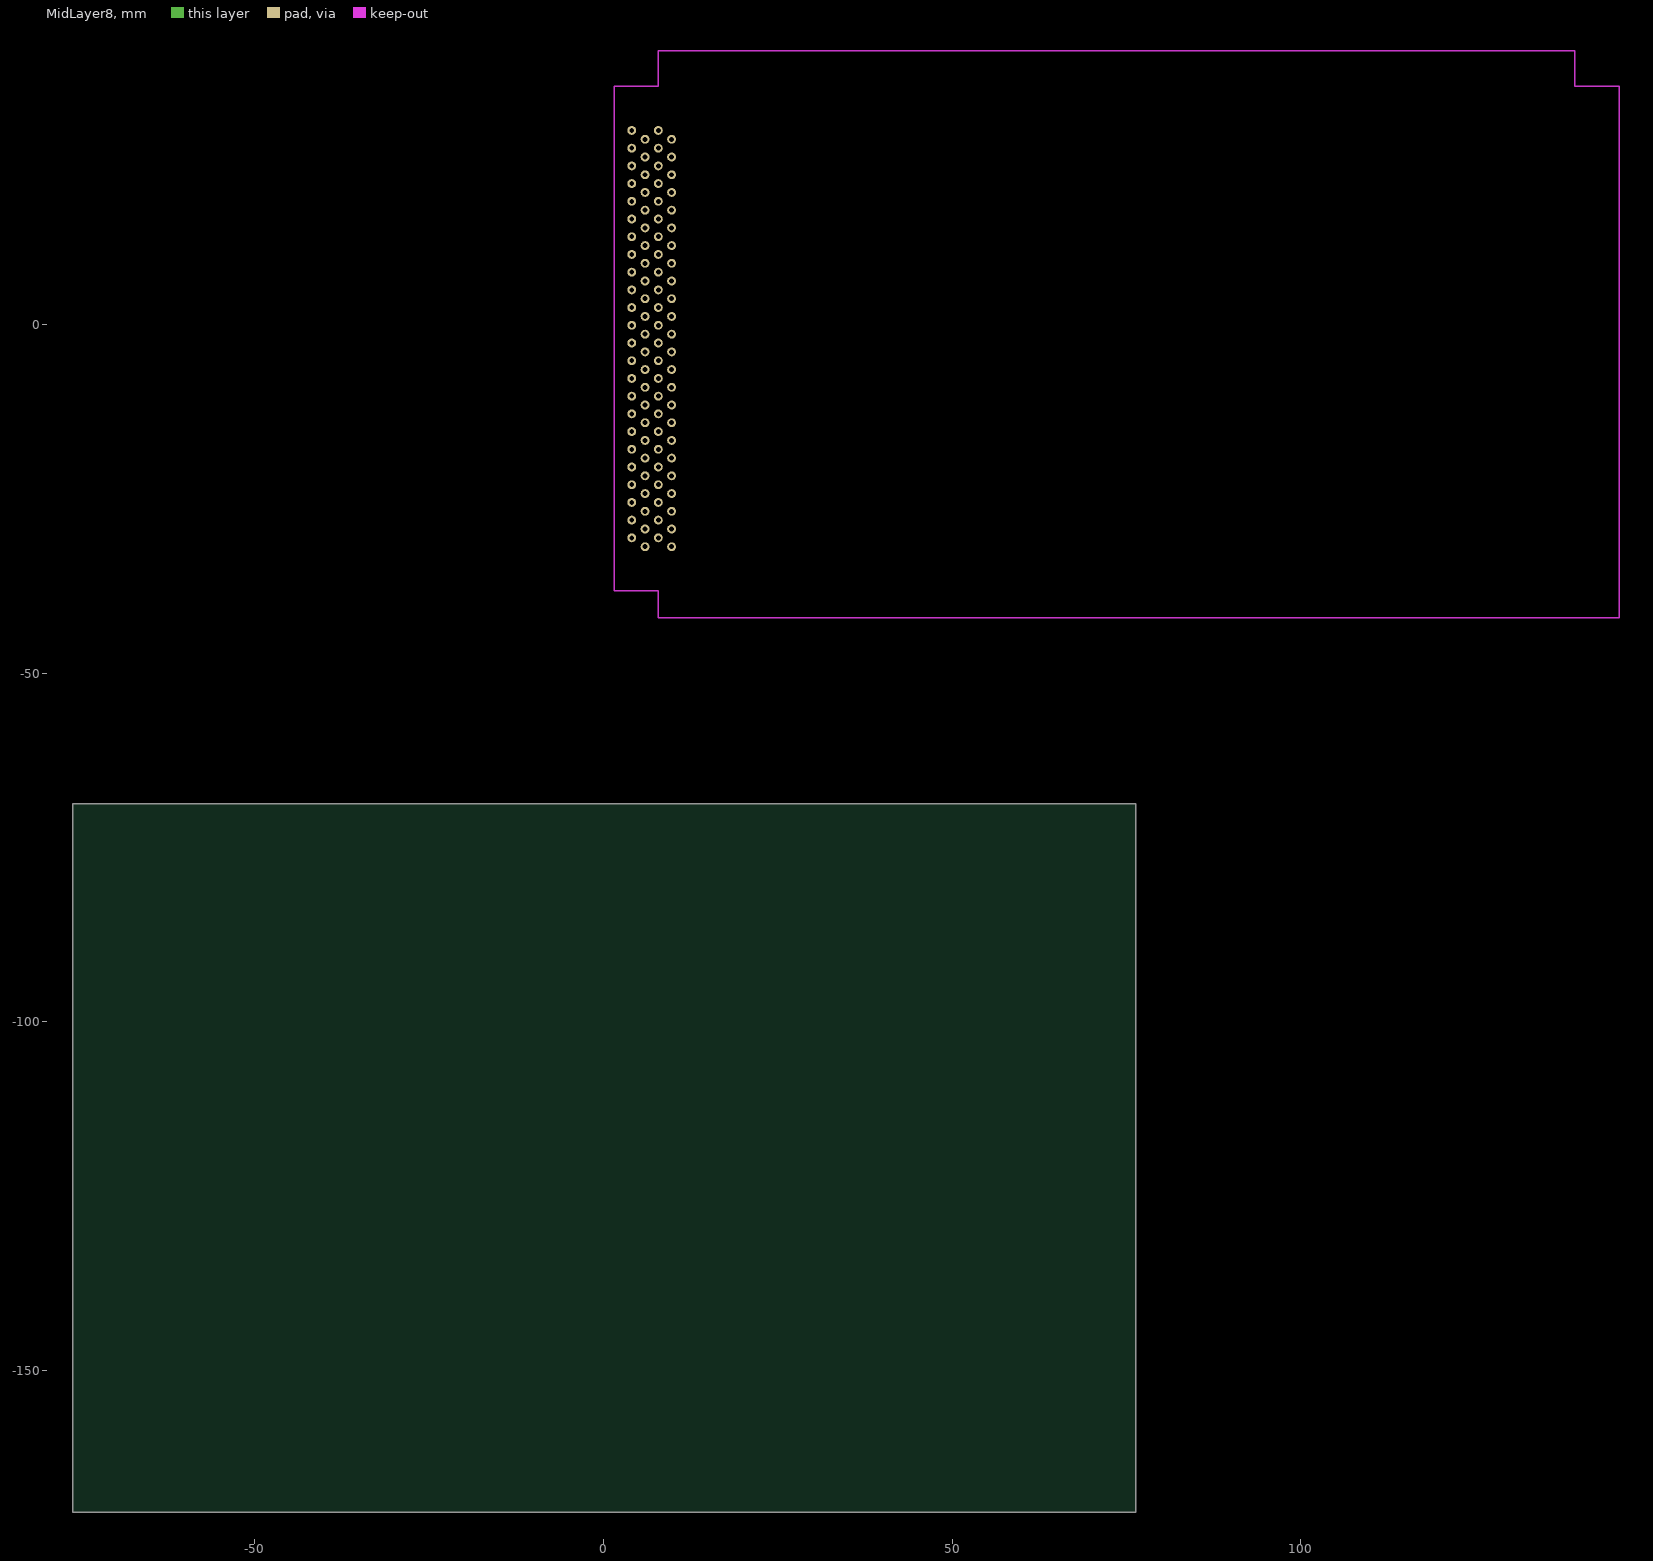
[diagram p11: MidLayer8]

## Layer stack, top to bottom
TopSolder: solder mask 0.0102, Solder Resist, Dk 3.5
TopLayer: signal copper 0.0356
Internal Plane 1: plane copper 0.0356
Internal Plane 2: plane copper 0.0356
Dielectric1: dielectric 0.32, FR-4, Dk 4.8
MidLayer1: signal copper 0.0356
Dielectric2: prepreg 0.32, FR-4, Dk 4.8
MidLayer2: signal copper 0.0356
Dielectric3: core 0.32, FR-4, Dk 4.8
MidLayer3: signal copper 0.0356
Dielectric4: prepreg 0.32, FR-4, Dk 4.8
MidLayer4: signal copper 0.0356
Dielectric5: core 0.32, FR-4, Dk 4.8
MidLayer5: signal copper 0.0356
Dielectric6: prepreg 0.32, FR-4, Dk 4.8
MidLayer6: signal copper 0.0356
Dielectric7: core 0.32, FR-4, Dk 4.8
MidLayer7: signal copper 0.0356
Dielectric8: prepreg 0.32, FR-4, Dk 4.8
MidLayer8: signal copper 0.0356
Dielectric9: core 0.32, FR-4, Dk 4.8
BottomLayer: signal copper 0.0356
BottomSolder: solder mask 0.0102, Solder Resist, Dk 3.5

## Board outline
-76.1,-170.3 76.3,-170.3 76.3,-68.7 -76.1,-68.7
board region "Default Layer Stack Region": -76.1,-170.3 76.3,-170.3 76.3,-68.7 -76.1,-68.7
board region "Default Layer Stack Region": 0.1,-43.3 146.785,-43.3 146.785,40.52 0.1,40.52

## Design rules (kind name [scope] priority, off if disabled: settings)
AssemblyTestPointUsage AssemblyTestPointUsage_1 [All] p2:
AssemblyTestpoint AssemblyTestpoint_1 [All] p2: testpointundercomponent=TRUE minsize=1.016 maxsize=2.54 preferedsize=1.524 minholesize=0 maxholesize=1.016 preferedholesize=0.813 testpointgrid=0.025 usegrid=TRUE gridtolerance=0 allowsidetop=TRUE allowsidebottom=TRUE
Clearance [All] p1: gap=0.2
ComponentClearance ComponentClearance_1 [All] p2: gap=0.254 collisioncheckmode=3 verticalgap=0.254 showdistances=FALSE
DiffPairsRouting DiffPairsRouting_1 [All] p2: maxlimit=0.254 minlimit=0.254 mostfreqgap=0.254 toplayer_minwidth=0.381 toplayer_maxwidth=0.381 toplayer_prefwidth=0.381 midlayer1_minwidth=0.381 midlayer1_maxwidth=0.381 midlayer1_prefwidth=0.381 midlayer2_minwidth=0.381 midlayer2_maxwidth=0.381 midlayer2_prefwidth=0.381 midlayer3_minwidth=0.381 midlayer3_maxwidth=0.381 midlayer3_prefwidth=0.381 midlayer4_minwidth=0.381 midlayer4_maxwidth=0.381 midlayer4_prefwidth=0.381 midlayer5_minwidth=0.381 midlayer5_maxwidth=0.381 midlayer5_prefwidth=0.381 midlayer6_minwidth=0.381 midlayer6_maxwidth=0.381 midlayer6_prefwidth=0.381 midlayer7_minwidth=0.381 midlayer7_maxwidth=0.381 midlayer7_prefwidth=0.381 midlayer8_minwidth=0.381 midlayer8_maxwidth=0.381 midlayer8_prefwidth=0.381 bottomlayer_minwidth=0.381 bottomlayer_maxwidth=0.381 bottomlayer_prefwidth=0.381 maxuncoupledlength=12.7
FabricationTestPointUsage TestPointUsage [All] p2: valid=0 allowmultiple=FALSE
FabricationTestpoint Testpoint [All] p2: side=3 testpointundercomponent=TRUE minsize=1.016 maxsize=2.54 preferedsize=1.524 minholesize=0.508 maxholesize=1.016 preferedholesize=0.813 testpointgrid=0.025 allowsidetop=TRUE allowsidebottom=TRUE usegrid=TRUE gridtolerance=0
FanoutControl Fanout_BGA_1 [IsBGA] p1: bgadir=Out bgaviamode=Centered fanoutstyle=Auto fanoutdirection=Alternating viagrid=0.025 // Fanout_BGA (Default Rule)
FanoutControl Fanout_BGA [IsBGA] p2: bgadir=Out bgaviamode=Centered fanoutstyle=Auto fanoutdirection=Alternating viagrid=0.025 // Fanout_BGA (Default Rule)
FanoutControl Fanout_LCC [IsLCC] p3: bgadir=Out bgaviamode=Centered fanoutstyle=Auto fanoutdirection=Alternating viagrid=0.025 // Fanout_LCC (Default Rule)
FanoutControl Fanout_LCC_1 [IsLCC] p4: bgadir=Out bgaviamode=Centered fanoutstyle=Auto fanoutdirection=Alternating viagrid=0.025 // Fanout_LCC (Default Rule)
FanoutControl Fanout_SOIC_1 [IsSOIC] p5: bgadir=Out bgaviamode=Centered fanoutstyle=Auto fanoutdirection=Alternating viagrid=0.025 // Fanout_SOIC (Default Rule)
FanoutControl Fanout_SOIC [IsSOIC] p6: bgadir=Out bgaviamode=Centered fanoutstyle=Auto fanoutdirection=Alternating viagrid=0.025 // Fanout_SOIC (Default Rule)
FanoutControl Fanout_Small_1 [(CompPinCount < 5)] p7: bgadir=Out bgaviamode=Centered fanoutstyle=Auto fanoutdirection=OutThenIn viagrid=0.025 // Fanout_Small (Default Rule)
FanoutControl Fanout_Small [(CompPinCount < 5)] p8: bgadir=Out bgaviamode=Centered fanoutstyle=Auto fanoutdirection=OutThenIn viagrid=0.025 // Fanout_Small (Default Rule)
FanoutControl Fanout_Default [All] p9: bgadir=Out bgaviamode=Centered fanoutstyle=Auto fanoutdirection=Alternating viagrid=0.025 // Fanout_Default (Default Rule)
FanoutControl Fanout_Default_1 [All] p10: bgadir=Out bgaviamode=Centered fanoutstyle=Auto fanoutdirection=Alternating viagrid=0.025 // Fanout_Default (Default Rule)
Height Height_1 [All] p2: minheight=0 maxheight=25.4 prefheight=12.7
HoleSize HoleSize_1 [All] p2: absolutevalues=TRUE maxlimit=2.54 minlimit=0.025 maxpercent=80.000 minpercent=20.000
HoleToHoleClearance HoleToHoleClearance_1 [All] p2: gap=0.254 allowstackedmicrovias=TRUE
LayerPairs LayerPairs_1 [All] p2: enforce=TRUE
MinimumSolderMaskSliver MinimumSolderMaskSliver_1 [All] p2: minsoldermaskwidth=0.254
NetAntennae NetAntennae_1 [All] p2: netantennaetolerance=0
PasteMaskExpansion PasteMaskExpansion_1 [All] p2: expansion=0
PlaneClearance [All] p1: clearance=0.508
PlaneClearance PlaneClearance_1 [All] p2: clearance=0.254
PlaneConnect [All] p1: planeconnectstyle=Relief reliefexpansion=0.508 reliefentries=4 reliefconductorwidth=0.254 reliefairgap=0.254
PolygonConnect [All] p1: connectstyle=Relief reliefconductorwidth=0.254 reliefentries=4 polygonreliefangle="90 Angle" airgapwidth=0.254
PolygonConnect PolygonConnect_1 [All] p2: connectstyle=Relief reliefconductorwidth=0.254 reliefentries=4 polygonreliefangle="90 Angle" airgapwidth=0.254
RoutingLayers [All] p1: top layer_v5=TRUE mid layer 1_v5=FALSE mid layer 2_v5=FALSE mid layer 3_v5=FALSE mid layer 4_v5=FALSE mid layer 5_v5=FALSE mid layer 6_v5=FALSE mid layer 7_v5=FALSE mid layer 8_v5=FALSE bottom layer_v5=TRUE
RoutingPriority RoutingPriority_1 [All] p2: routingpriority=0
RoutingTopology RoutingTopology_1 [All] p2: topology=Shortest
RoutingVias [All] p1: holewidth=0.6 width=1 viastyle="Through Hole" minholewidth=0.711 minwidth=1.27 maxholewidth=0.711 maxwidth=1.27
ShortCircuit ShortCircuit_1 [All] p2: allowed=FALSE
SilkToBoardRegionClearance SilkToBoardRegionClearance_1 [All] p2:
SilkToSilkClearance SilkToSilkClearance_1 [All] p2: silktosilkclearance=0.254
SilkToSolderMaskClearance SilkscreenOverComponentPads [IsPad] p2: minsilkscreentomaskgap=0.254 clearancetoexposedcopper=TRUE
SolderMaskExpansion [All] p1: expansion=0.102
SolderMaskExpansion SolderMaskExpansion_1 [All] p2: expansion=0.051
UnRoutedNet UnRoutedNet_1 [All] p2:
UnpouredPolygon [All] p1: allowunpoured=FALSE
UnpouredPolygon UnpouredPolygon_1 [All] p2: allowunpoured=FALSE
Width [All] p1: maxlimit=0.2 minlimit=0.2 preferedwidth=0.2
21 further rules are at their usual default settings.

## Components (designator, comment, footprint, x,y, rotation, side; value= is the part's Value field where it differs from the comment)
P1 "SBUS96" SBUS96 4.062,27.82 r270 top locked

## Footprints (in the part's own frame and the unit in brackets; to place one, negate y for a bottom-side part, rotate by r counter-clockwise, add the part's x,y. Pads: shape width x height; smd on the part's side, far side on the other; paste and mask are expansions set on the pad)
SBUS96 [mil]
  rect 50x50 / inner round 50 / far side rect 50x50 hole 28: 1(0,0)
  round 50 hole 28: 2(50,75) 3(100,0) 4(150,75) 5(200,0) 6(250,75) 7(300,0) 8(350,75) 9(400,0) 10(450,75) 11(500,0) 12(550,75) 13(600,0) 14(650,75) 15(700,0) 16(750,75) 17(800,0) 18(850,75) 19(900,0) 20(950,75) 21(1000,0) 22(1050,75) 23(1100,0) 24(1150,75) 25(1200,0) 26(1250,75) 27(1300,0) 28(1350,75) 29(1400,0) 30(1450,75) 31(1500,0) 32(1550,75) 33(1600,0) 34(1650,75) 35(1700,0) 36(1750,75) 37(1800,0) 38(1850,75) 39(1900,0) 40(1950,75) 41(2000,0) 42(2050,75) 43(2100,0) 44(2150,75) 45(2200,0) 46(2250,75) 47(2300,0) 48(2350,75) 49(0,150) 50(50,225) 51(100,150) 52(150,225) 53(200,150) 54(250,225) 55(300,150) 56(350,225) 57(400,150) 58(450,225) 59(500,150) 60(550,225) 61(600,150) 62(650,225) 63(700,150) 64(750,225) 65(800,150) 66(850,225) 67(900,150) 68(950,225) 69(1000,150) 70(1050,225) 71(1100,150) 72(1150,225) 73(1200,150) 74(1250,225) 75(1300,150) 76(1350,225) 77(1400,150) 78(1450,225) 79(1500,150) 80(1550,225) 81(1600,150) 82(1650,225) 83(1700,150) 84(1750,225) 85(1800,150) 86(1850,225) 87(1900,150) 88(1950,225) 89(2000,150) 90(2050,225) 91(2100,150) 92(2150,225) 93(2200,150) 94(2250,225) 95(2300,150) 96(2350,225)
  silkscreen extent -223,-30 2573,255

## Free pads (board coordinates)
  round 1.27 hole 3.175: 1(141.705,36.71) 2(5.18,36.71) 3(5.18,-40.76)

## Nets (pads, with @x,y where several pads share a name; then routed paths per layer and width w, separated by ;. In a path a pad name is that pad's centre, name@x,y a point inside that pad or via, vN(x,y) a via of type N, cw(c..) or ccw(c..) an arc to the next point about the centre after c; other vN are vias at no path point)
pads on no net: P1.1 P1.2 P1.3 P1.4 P1.5 P1.6 P1.7 P1.8 P1.9 P1.10 P1.11 P1.12 P1.13 P1.14 P1.15 P1.16 P1.17 P1.18 P1.19 P1.20 P1.21 P1.22 P1.23 P1.24 P1.25 P1.26 P1.27 P1.28 P1.29 P1.30 P1.31 P1.32 P1.33 P1.34 P1.35 P1.36 P1.37 P1.38 P1.39 P1.40 P1.41 P1.42 P1.43 P1.44 P1.45 P1.46 P1.47 P1.48 P1.49 P1.50 P1.51 P1.52 P1.53 P1.54 P1.55 P1.56 P1.57 P1.58 P1.59 P1.60 P1.61 P1.62 P1.63 P1.64 P1.65 P1.66 P1.67 P1.68 P1.69 P1.70 P1.71 P1.72 P1.73 P1.74 P1.75 P1.76 P1.77 P1.78 P1.79 P1.80 P1.81 P1.82 P1.83 P1.84 P1.85 P1.86 P1.87 P1.88 P1.89 P1.90 P1.91 P1.92 P1.93 P1.94 P1.95 P1.96
copper on no net: | length 42.4
  TopLayer w0.254: -1.846,-115.3 ccw(c-8.6,-115.3) -1.846,-115.3

## Keep-outs
KeepOutLayer:
  lines w0.203: 1.522,-38.22 1.522,34.17 7.872,34.17 7.872,39.25 139.317,39.25 139.317,34.17 145.667,34.17 145.667,-42.03 7.872,-42.03 7.872,-38.22 1.522,-38.22

## Other copper
TopLayer:
  text ".GTL" at 139.19,45.346 h2.29
MidLayer1:
  text ".G1" at 139.19,45.346 h2.29
MidLayer2:
  text ".G2" at 139.19,45.346 h2.29
MidLayer3:
  text ".G3" at 139.19,45.346 h2.29
MidLayer4:
  text ".G4" at 139.19,45.346 h2.29
MidLayer5:
  text ".G5" at 139.19,45.346 h2.29
MidLayer6:
  text ".G6" at 139.19,45.346 h2.29
MidLayer7:
  text ".G7" at 139.19,45.346 h2.29
MidLayer8:
  text ".G8" at 139.19,45.346 h2.29
BottomLayer:
  text "P/N XXXXXX-XXX REV A" at 33.628,45.6 h1.91
  text ".GBL" at 139.19,45.346 h2.29

## Silkscreen, mask and mechanical layers (free items; w line width, h text height)
TopOverlay:
  rectangle: 7.237,50.756 26.287,55.836
  rectangle: 7.237,58.122 26.287,63.202
  lines w0.254: 35.472,60.738 ccw(c36.701,61.742) 35.475,60.734
  text "C" at 38.098,60.789 h1.52
  text "2002 COMPANY NAME" at 41.908,60.789 h1.91
  text "S/N" at 0.887,59.583 h1.91
  text "BOARD NAME" at 38.098,56.344 h1.91
  text "ASSY NO.: XXXXXX" at 38.098,52.534 h1.91
  text "REV" at 0.887,52.026 h1.91
  text ".GTO" at 139.19,45.346 h2.29
  text "1" at 2.005,27.185 h1.22
  text "50" at 11.318,25.915 h1.22
  text "47" at 0.947,-31.235 h1.22
  text "96" at 11.318,-32.505 h1.22
TopPaste:
  text ".GTP" at 139.19,45.346 h2.29
BottomPaste:
  text ".GBP" at 139.19,45.346 h2.29
TopSolder:
  text ".GTS" at 139.19,45.346 h2.29
BottomSolder:
  text ".GBS" at 139.19,45.346 h2.29
Mechanical1:
  lines w0.508: 0.1,-43.3 0.1,40.52 146.785,40.52 146.785,-43.3 0.1,-43.3
Mechanical4:
  text ".Pcb_File_Name_No_Path" at 90.93,50.172 h2.29
  text ".Printout_Name" at 90.93,45.346 h2.29
DrillDrawing:
  text ".LEGEND" at 152.754,-18.154 h2.29
  text "Drilling Details." at 152.754,-23.234 h2.29

## Dimensions
-0.408,-40.76 to 0.1,-43.3 on Mechanical4
5.18,-43.808 to 0.1,-43.3 on Mechanical4